# Altium PCB Misko 3.PcbDoc (part 1 of 4)
Units mm, origin at the board's own origin, x right, y up, seen from the top; angles counter-clockwise.
Board outline 128.1 x 53.3 mm, 6 copper layers (Top (LS), Mid 1 (LS), Mid 2 (GND), Mid 3 (P/HS), Mid 4 (GND), Bottom (HS)), stack 1.597 mm thick; 230 components, 214 nets, 896 pads, 500 vias.
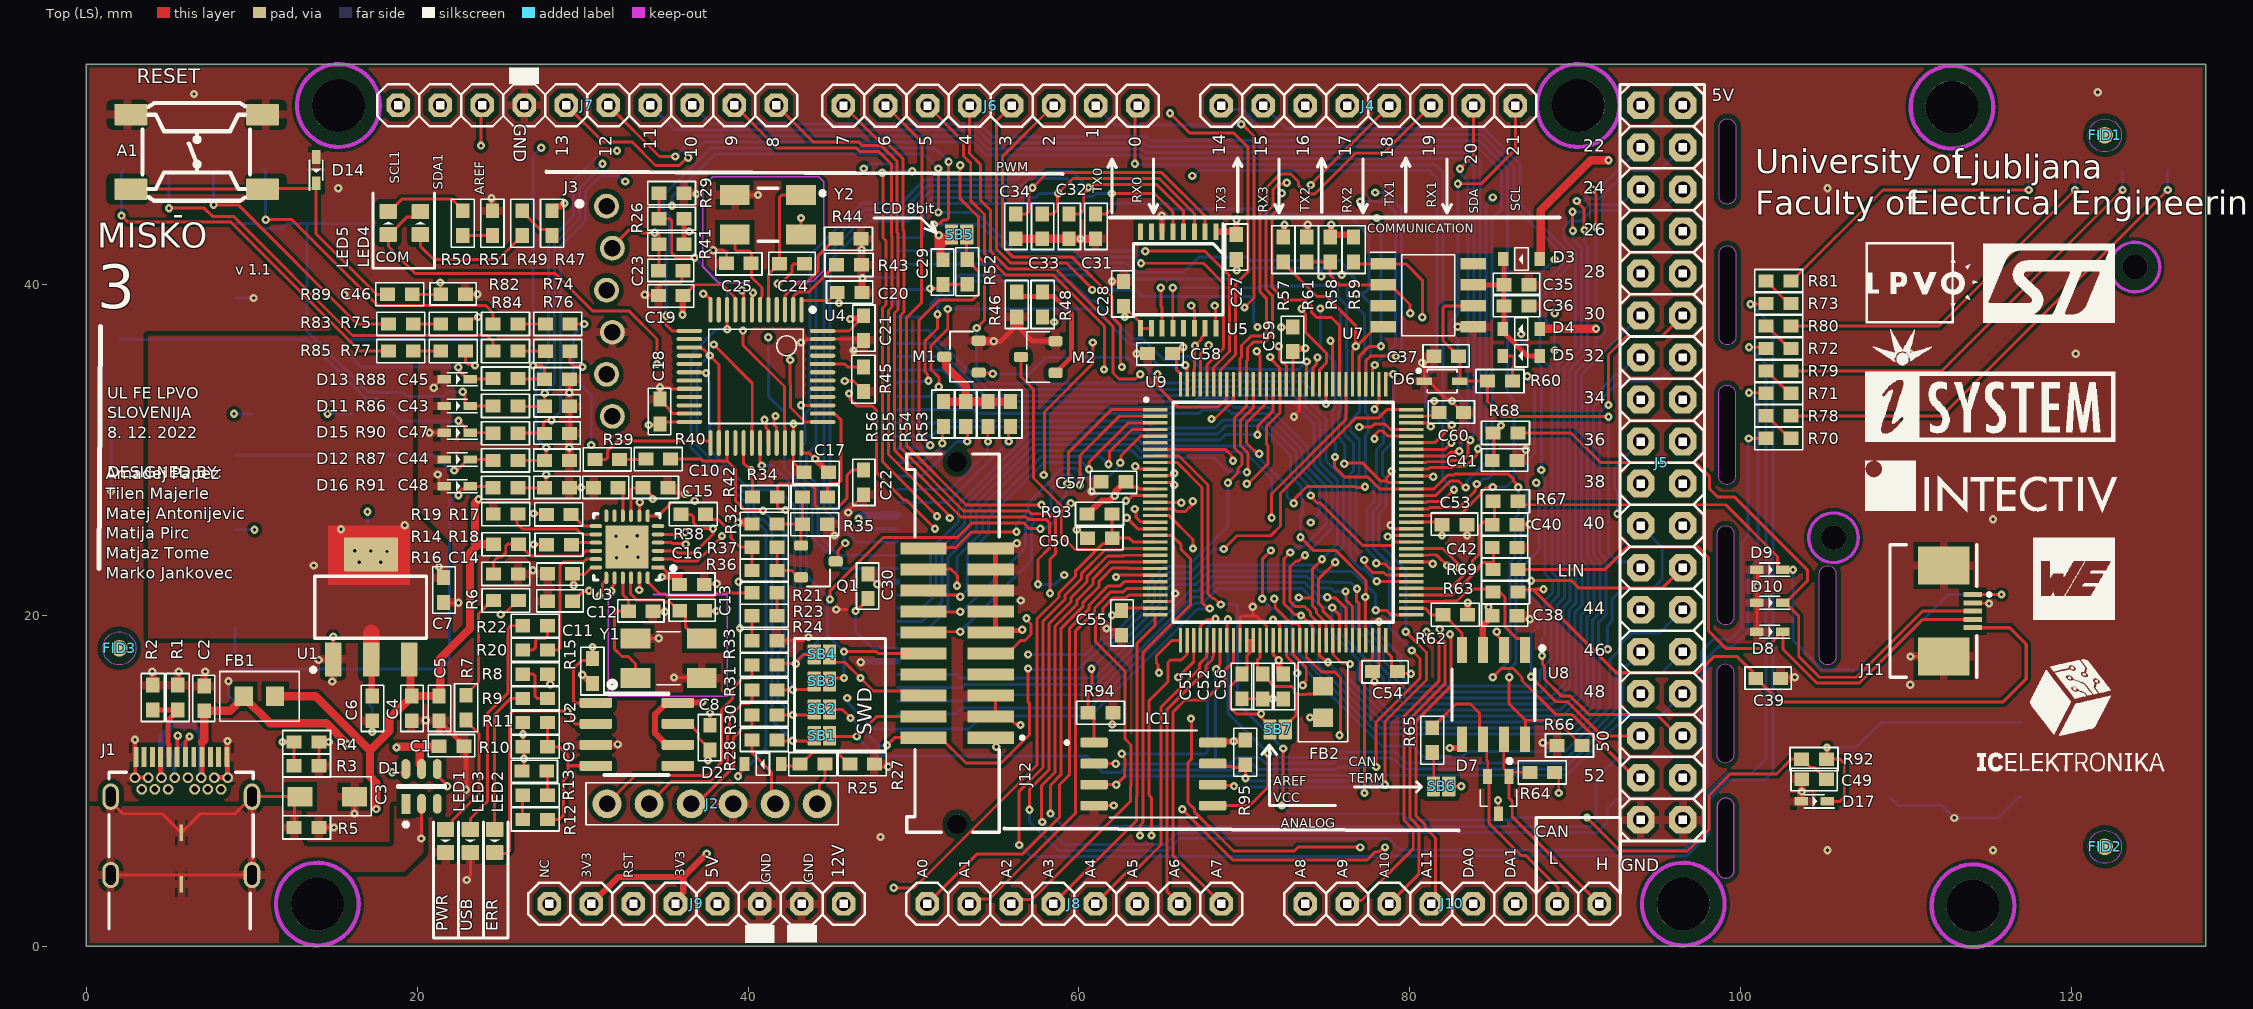
[diagram p0: Top (LS) view]
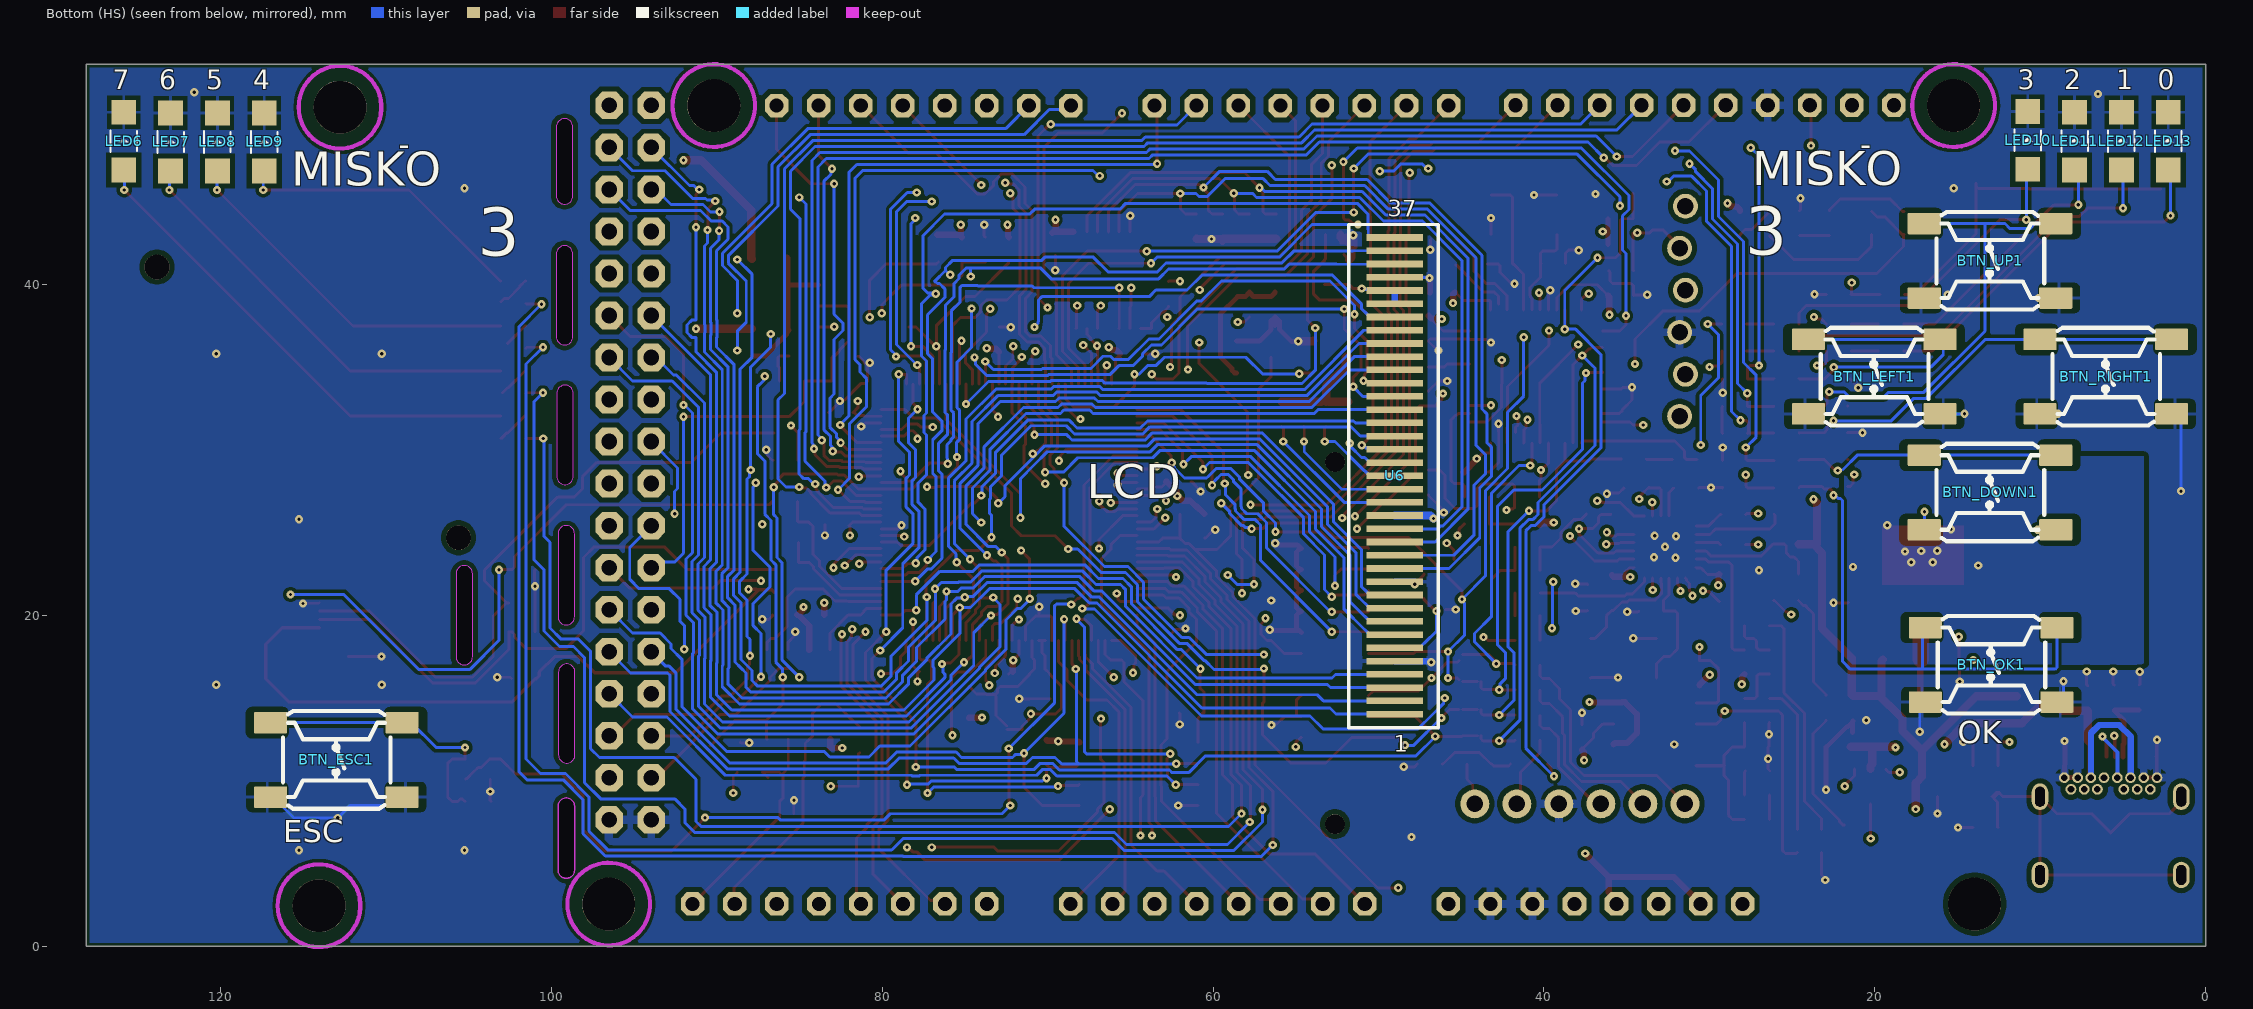
[diagram p1: Bottom (HS) view, seen from below]
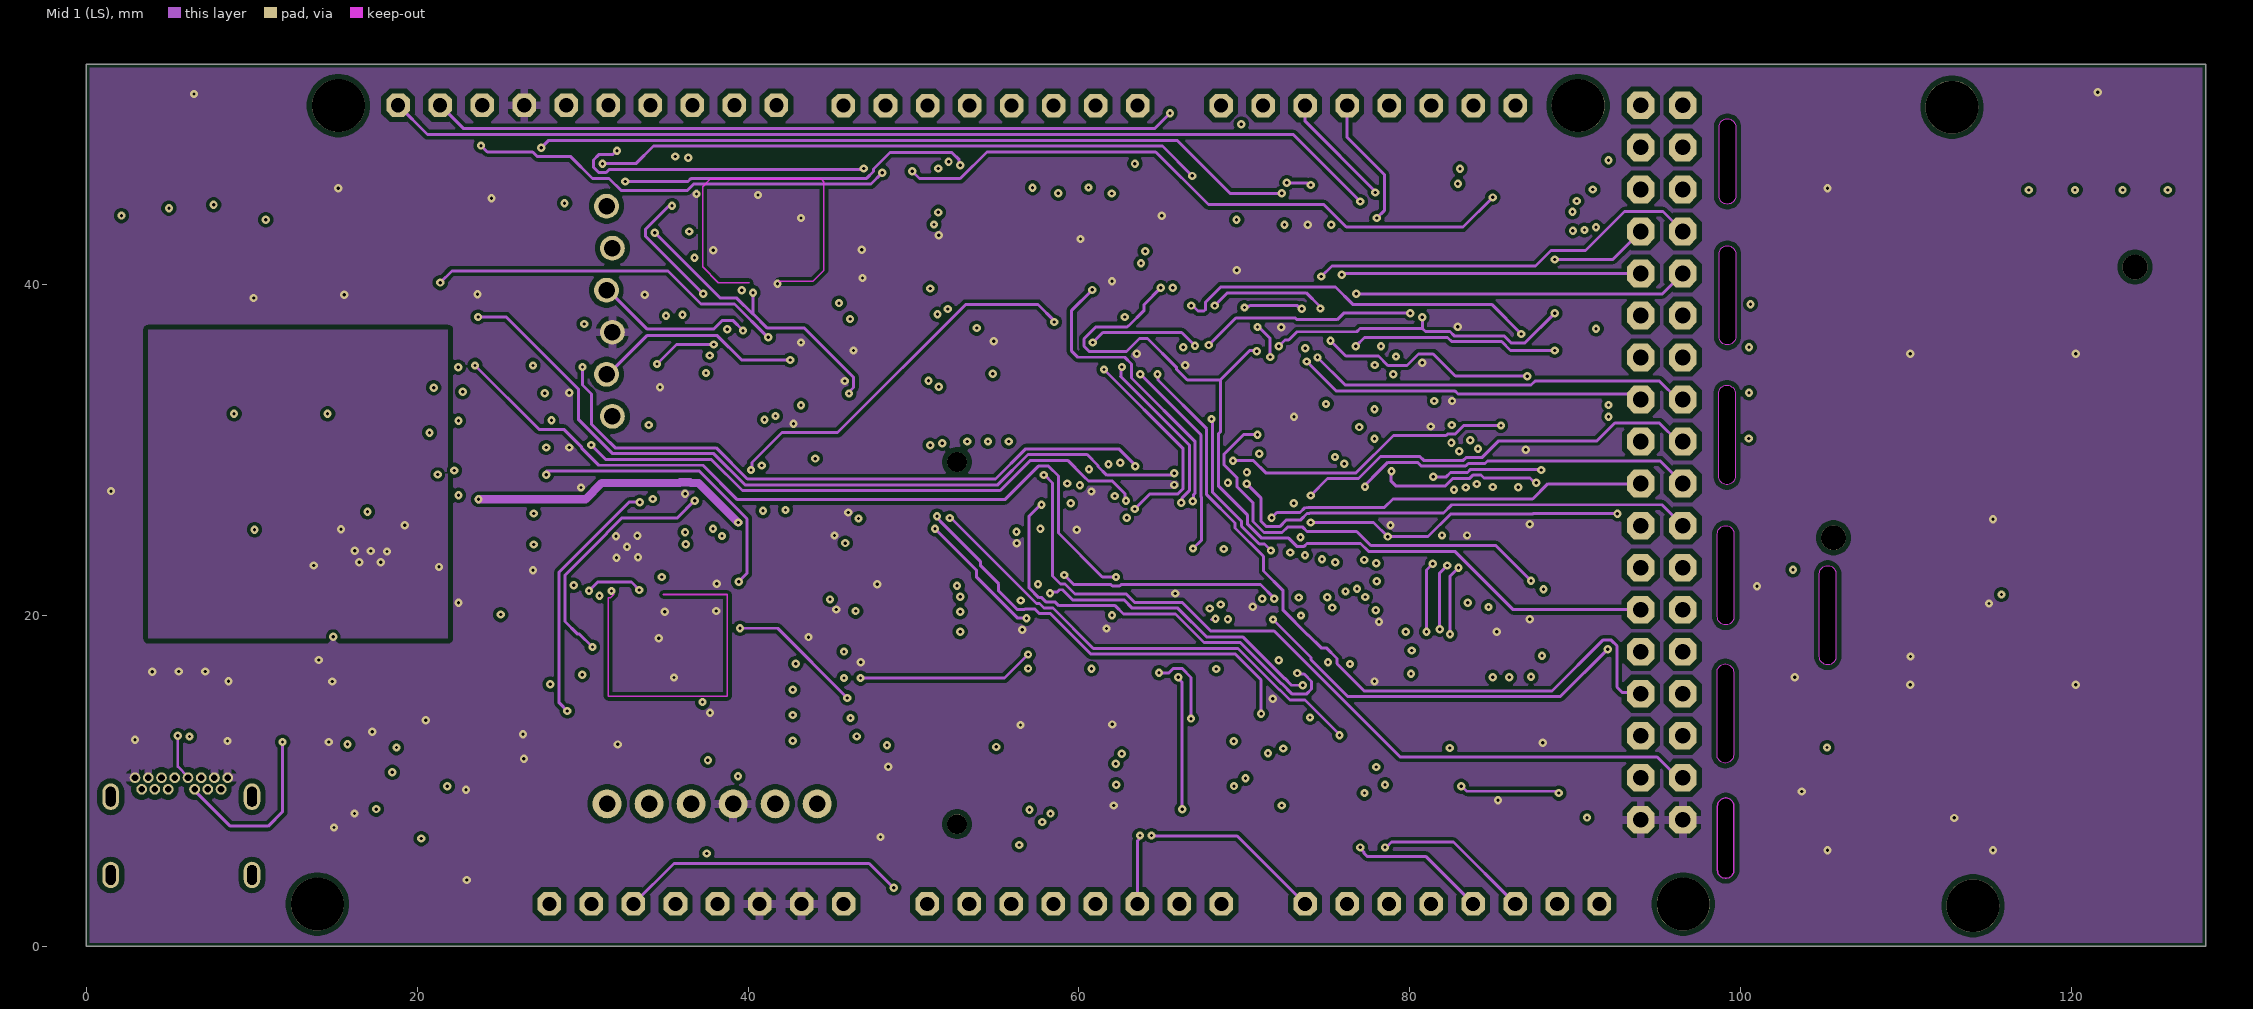
[diagram p2: Mid 1 (LS)]
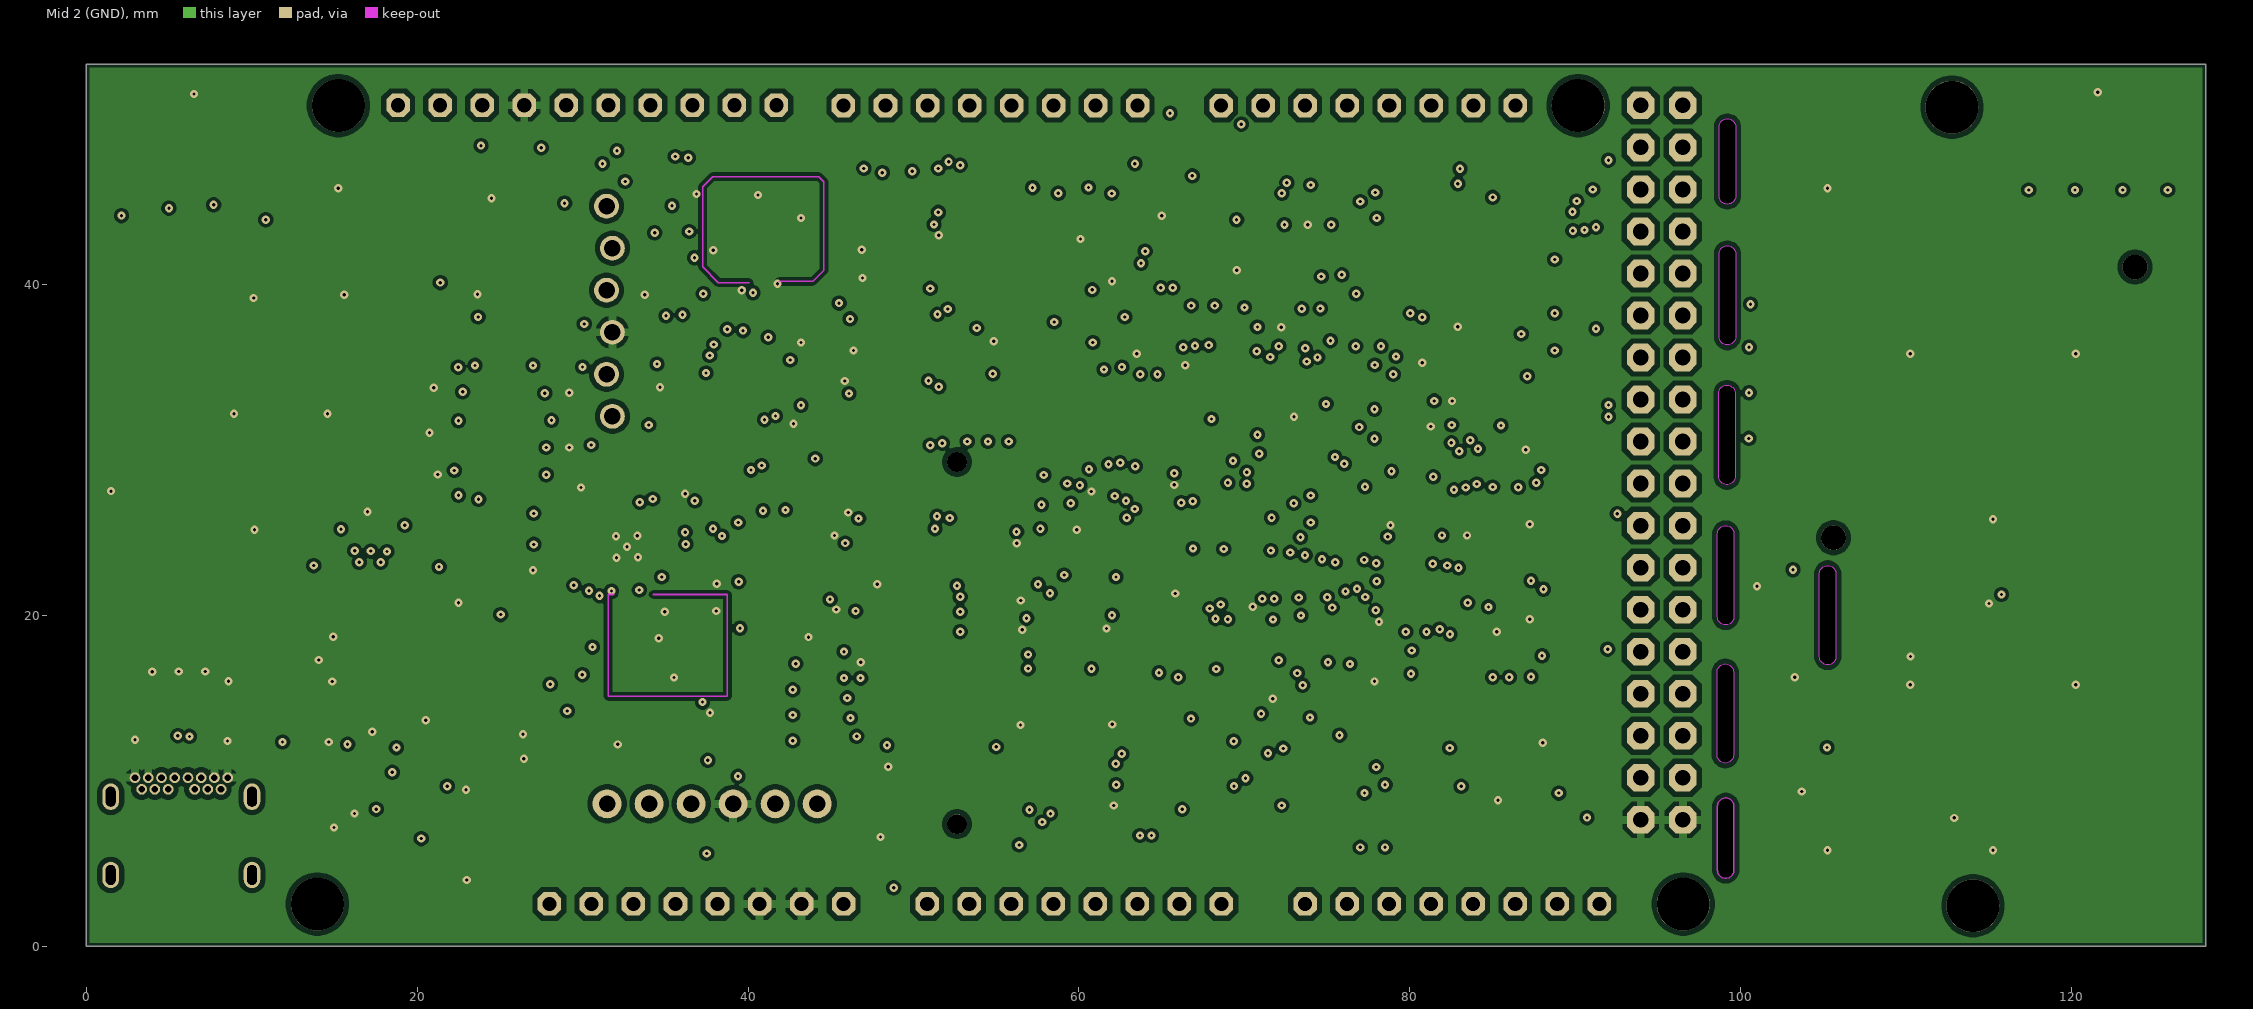
[diagram p3: Mid 2 (GND)]
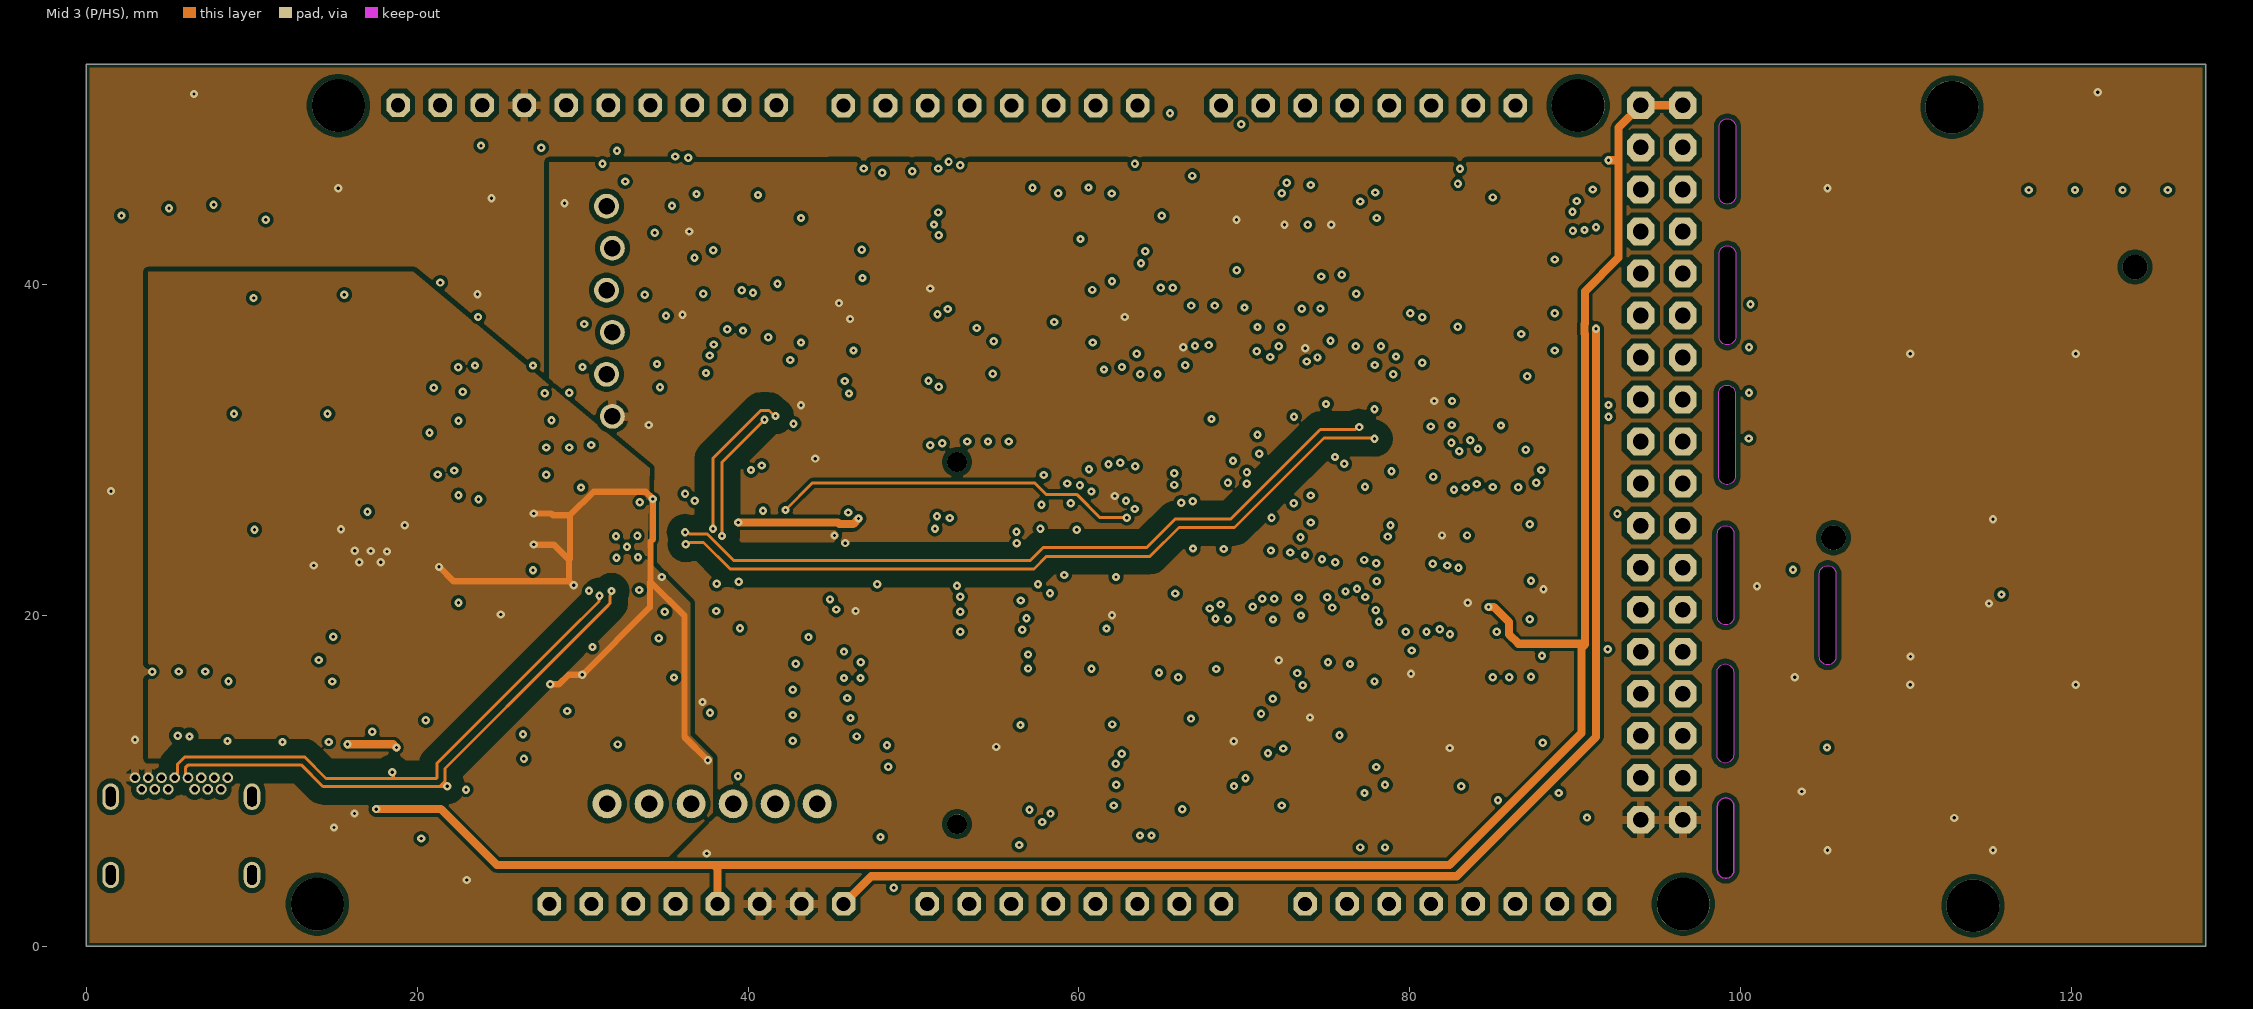
[diagram p4: Mid 3 (P/HS)]
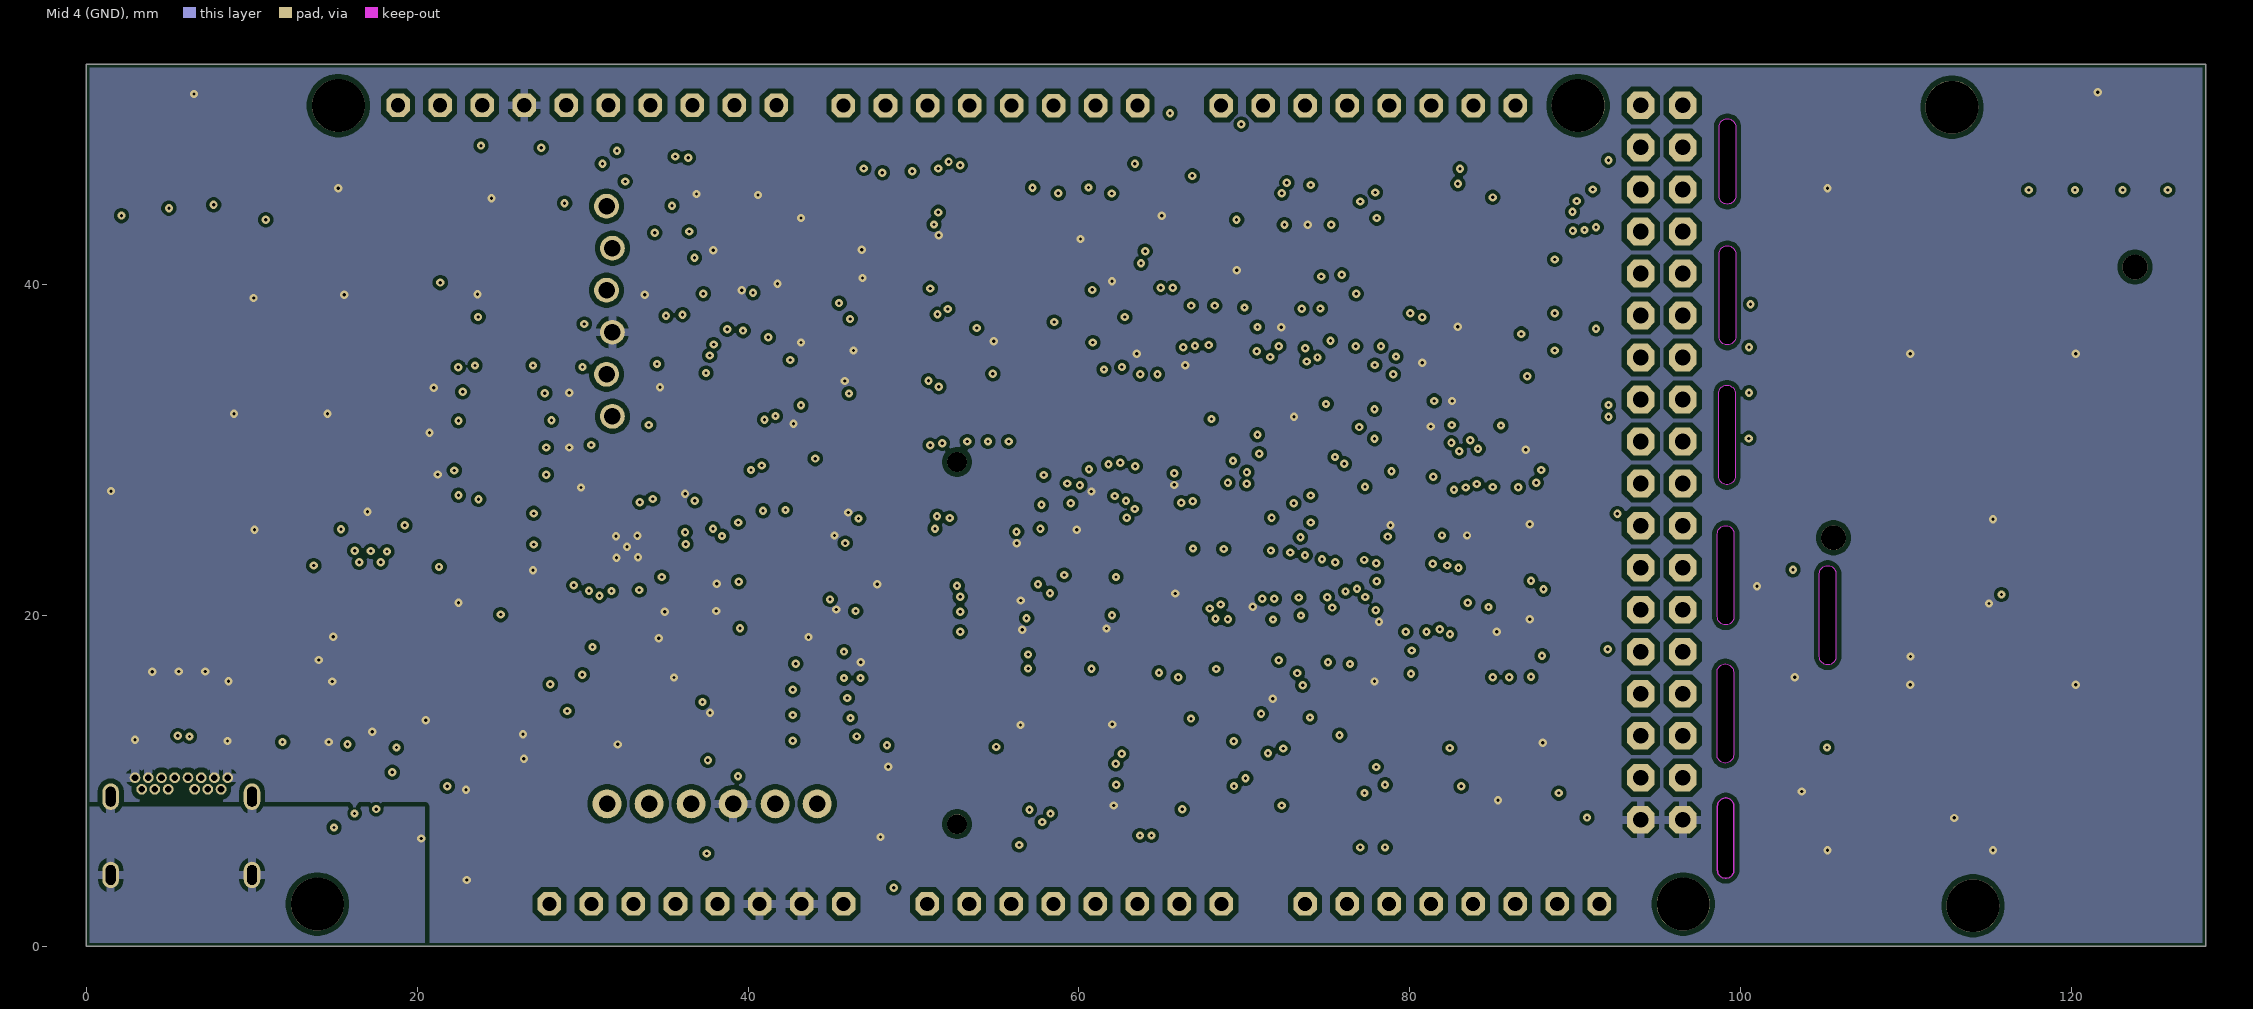
[diagram p5: Mid 4 (GND)]

## Layer stack, top to bottom
Top Mask: solder mask 0.015, Solder Resist, Dk 3.8
Top (LS): signal copper 0.035
Dielectric 1: prepreg 0.1, 2313, Dk 4.05
Mid 1 (LS): signal copper 0.0175
Core 1: core 0.565, FR-4, Dk 4.5
Mid 2 (GND): signal copper 0.0175
Dielectric 2: prepreg 0.127, 2116, Dk 4.25
Mid 3 (P/HS): signal copper 0.0175
Core 2: core 0.565, FR-4, Dk 4.5
Mid 4 (GND): signal copper 0.0175
Dielectric 3: prepreg 0.1, 2313, Dk 4.05
Bottom (HS): signal copper 0.035
Bottom Mask: solder mask 0.015, Solder Resist, Dk 3.8

## Board outline
0,0 128.1,0 128.1,53.3 0,53.3
cut-out: 104.75,17.5 104.75,22.5 cw(c105.25,22.5) 105.75,22.5 105.75,17.5 cw(c105.25,17.5)
cut-out: 98.687,45.339 98.687,49.505 cw(c99.187,49.505) 99.687,49.505 99.687,45.339 cw(c99.187,45.339)
cut-out: 98.687,36.83 98.687,41.83 cw(c99.187,41.83) 99.687,41.83 99.687,36.83 cw(c99.187,36.83)
cut-out: 98.661,28.397 98.661,33.397 cw(c99.162,33.397) 99.662,33.397 99.662,28.397 cw(c99.162,28.397)
cut-out: 98.585,19.914 98.585,24.914 cw(c99.085,24.914) 99.586,24.914 99.586,19.914 cw(c99.085,19.914)
cut-out: 98.56,11.557 98.56,16.557 cw(c99.06,16.557) 99.56,16.557 99.56,11.557 cw(c99.06,11.557)
cut-out: 98.585,4.592 98.585,8.454 cw(c99.085,8.454) 99.586,8.454 99.586,4.592 cw(c99.085,4.592)
cut-out: 98.585,4.605 ccw(c99.085,4.605) 99.586,4.605 99.586,8.454 ccw(c99.085,8.454) 98.585,8.454

## Design rules (kind name [scope] priority, off if disabled: settings)
BoardOutlineClearance [All] p1: gap=0.2 ignorepadtopadclearanceinfootprint=FALSE except(0.4: Arc-SplitBarrior Arc-SplitContinuation Track-SplitBarrior Track-SplitContinuation SMDPad-SplitBarrior SMDPad-SplitContinuation THPad-SplitBarrior THPad-SplitContinuation Via-SplitBarrior Via-SplitContinuation Fill-SplitBarrior Fill-SplitContinuation Poly-SplitBarrior Poly-SplitContinuation Region-SplitBarrior Region-SplitContinuation Text-SplitBarrior Text-SplitContinuation)
Clearance Clearance_USB [InNetClass('USB') vs OnLayer('Mid 3 (P/HS)')] p1: gap=0.3 ignorepadtopadclearanceinfootprint=TRUE except(0.12: Arc-Arc Arc-Track Arc-SMDPad Track-Track Track-SMDPad SMDPad-SMDPad; 0.127: Arc-Via Track-Via SMDPad-Via THPad-Via Via-Via; 0.15: THPad-THPad; 0.2: Arc-THPad Arc-Hole Track-THPad Track-Hole SMDPad-THPad SMDPad-Hole THPad-Hole Via-Hole Text-Hole; 0.254: Arc-Text Track-Text SMDPad-Text THPad-Text Via-Text Text-Text; 1: Arc-Fill Arc-Poly Arc-Region Track-Fill Track-Poly Track-Region)
Clearance "Clearance Outer LAyers" [(OnLayer('Top (LS)') OR OnLayer('Bottom (HS)'))] p2: gap=0.2 ignorepadtopadclearanceinfootprint=TRUE except(0.15: THPad-THPad; 0.18: Arc-Arc Arc-Track Track-Track; 0.254: Arc-Text Track-Text SMDPad-Text THPad-Text Via-Text Text-Text; 0.3: SMDPad-Fill SMDPad-Poly SMDPad-Region THPad-Fill THPad-Poly THPad-Region Fill-Fill Fill-Poly Fill-Region Fill-Text Fill-Hole Poly-Poly Poly-Region Poly-Text Poly-Hole Region-Region Region-Text Region-Hole)
Clearance [All] p3: gap=0.2 ignorepadtopadclearanceinfootprint=TRUE except(0.15: THPad-THPad; 0.17: Arc-Arc Arc-Track Track-Track; 0.254: Arc-Text Track-Text SMDPad-Text THPad-Text Via-Text Text-Text; 0.3: SMDPad-Fill SMDPad-Poly SMDPad-Region THPad-Fill THPad-Poly THPad-Region Fill-Fill Fill-Poly Fill-Region Fill-Text Fill-Hole Poly-Poly Poly-Region Poly-Text Poly-Hole Region-Region Region-Text Region-Hole)
DiffPairsRouting [InDifferentialPairClass('All Differential Pairs')] p1: maxlimit=1.2 minlimit=0.254 mostfreqgap=1.114 toplayer_mingap=0.3 toplayer_minwidth=0.18 toplayer_maxwidth=0.22 toplayer_prefwidth=0.22 midlayer1_mingap=0.7 midlayer1_maxgap=0.9 midlayer1_prefgap=0.871 midlayer1_minwidth=0.16 midlayer1_maxwidth=0.16 midlayer1_prefwidth=0.16 midlayer3_mingap=0.3 midlayer3_maxgap=0.4 midlayer3_prefgap=0.377 midlayer3_minwidth=0.18 midlayer3_maxwidth=0.18 midlayer3_prefwidth=0.18 bottomlayer_mingap=0.3 bottomlayer_minwidth=0.22 bottomlayer_maxwidth=0.22 bottomlayer_prefwidth=0.22 impedanceprofiledriven=TRUE impedanceprofileid={B0114516-4247-4580-AF57-087C0DDC30B5} impedanceprofilevalue=90.000000 maxuncoupledlength=12.7
Height [All] p1: minheight=0 maxheight=500 prefheight=12.7
HoleSize [All] p1: absolutevalues=TRUE maxlimit=6.3 minlimit=0.2 maxpercent=80.000 minpercent=20.000
HoleToHoleClearance [All] p1: gap=0.4 allowstackedmicrovias=TRUE
MatchedLengths [InDifferentialPair ('USB_DATA_DIFF')] p1: tolerance=25.4 checknetsindiffpair=FALSE checkdiffpairvsdiffpair=TRUE checkxsignals=TRUE checkothers=TRUE
MinimumAnnularRing [All] p1: minimumring=0.076
MinimumSolderMaskSliver [All] p1: minsoldermaskwidth=0.1
PasteMaskExpansion [All] p1: expansion=-0.02 percent=-20.000000
PolygonConnect PolygonConnect_bot [OnBottomLayer] p1: thpad.connectstyle=Relief thpad.reliefconductorwidth=0.508 thpad.reliefentries=4 thpad.polygonreliefangle="90 Angle" thpad.airgapwidth=0.254 smdpad.connectstyle=Relief smdpad.reliefconductorwidth=0.2 smdpad.reliefentries=4 smdpad.polygonreliefangle="90 Angle" smdpad.airgapwidth=0.254 via.connectstyle=Direct via.reliefconductorwidth=0.508 via.reliefentries=4 via.polygonreliefangle="90 Angle" via.airgapwidth=0.254
PolygonConnect [All] p2: thpad.connectstyle=Relief thpad.reliefconductorwidth=0.508 thpad.reliefentries=4 thpad.polygonreliefangle="90 Angle" thpad.airgapwidth=0.254 smdpad.connectstyle=Relief smdpad.reliefconductorwidth=0.508 smdpad.reliefentries=4 smdpad.polygonreliefangle="90 Angle" smdpad.airgapwidth=0.254 via.connectstyle=Direct via.reliefconductorwidth=0.508 via.reliefentries=4 via.polygonreliefangle="90 Angle" via.airgapwidth=0.254
RoutingCorners [All] p1: cornerstyle=Round minsetback=2.54 maxsetback=2.54
RoutingVias [All] p1: holewidth=0.5 width=1 viastyle="Through Hole" minholewidth=0.2 minwidth=0.5 maxholewidth=1 maxwidth=2
SilkToSilkClearance [All] p1: silktosilkclearance=0.01
SilkToSolderMaskClearance [IsPad] p1: minsilkscreentomaskgap=0.05 clearancetoexposedcopper=TRUE
SolderMaskExpansion SolderMaskExpansion_via [IsVia] p1: expansion=0.102 istentingtop=TRUE
SolderMaskExpansion [All] p2: expansion=0.1 istentingtop=FALSE
Width [All] p1: maxlimit=1 minlimit=0.15 preferedwidth=0.18
21 further rules are at their usual default settings.

## Classes and differential pairs
component class U_MCU: C50 C51 C52 C53 C54 C55 C56 C57 C58 C59 C60 FB2 R93 SB7 T11 U9
component class "U_LCD + TOUCH": C27 C28 C29 C30 C31 C32 C33 C34 M1 R52 R53 R54 R55 R56 SB5 T7 U5 U6
net class DAC[1..2]: DAC1 DAC2
component class U_TRACE: J12
net class QSPI_IO[0..3]: QSPI_IO0 QSPI_IO1 QSPI_IO2 QSPI_IO3
net class LED[0..7]: LED0 LED1 LED2 LED3 LED4 LED5 LED6 LED7
net class AD[0..11]: AD0 AD1 AD2 AD3 AD4 AD5 AD6 AD7 AD8 AD9 AD10 AD11
net class USB: USB2_N USB2_P USB_N USB_P USB_STLINK_N USB_STLINK_P
net class PWM[2..13]: PWM2 PWM3 PWM4 PWM5 PWM6 PWM7 PWM8 PWM9 PWM10 PWM11 PWM12 PWM13
net class FMC_D[0..15]: FMC_D0 FMC_D1 FMC_D2 FMC_D3 FMC_D4 FMC_D5 FMC_D6 FMC_D7 FMC_D8 FMC_D9 FMC_D10 FMC_D11 FMC_D12 FMC_D13 FMC_D14 FMC_D15
component class U_USB_HUB: C10 C11 C12 C13 C14 C15 C16 LED3 R14 R15 R16 R17 R18 R19 R20 R21 R22 R23 R24 T5 U3 Y1
component class U_USB_C: C1 C2 C3 D1 J1 J? R1 R2 R3 R4 R5 T3
component class U_STLINK_2.1: C17 C18 C19 C20 C21 C22 C23 C24 C25 D2 J2 J3 LED4 LED5 M2 Q1 R25 R26 R27 R28 R29 R30 R31 R32 R33 R34 R35 R36 R37 R38 R39 R40 R41 R42 R43 R44 R45 R46 R47 R48 R49 R50 R51 SB1 SB2 SB3 SB4 T6 U4 Y2
component class U_POWER: C4 C5 C6 C7 C8 C9 FB1 LED1 LED2 R6 R7 R8 R9 R10 R11 R12 R13 T12 U1 U2
component class "U_CAN + LIN": C35 C36 C37 C38 D3 D4 D5 D6 D7 R57 R58 R59 R60 R61 R62 R63 R64 R65 R66 SB6 T8 U7 U8
component class "U_JOYSTICK + LED": C39 C40 C41 C42 D8 D9 D10 J11 LED6 LED7 LED8 LED9 LED10 LED11 LED12 LED13 R67 R68 R69 R70 R71 R72 R73 R74 R75 R76 R77 R78 R79 R80 R81 R82 R83 R84 R85 T10
component class U_QSPI: IC1 R94 R95 T9
component class U_BUTTONS: A1 BTN_DOWN1 BTN_ESC1 BTN_LEFT1 BTN_OK1 BTN_RIGHT1 BTN_UP1 C43 C44 C45 C46 C47 C48 C49 D11 D12 D13 D14 D15 D16 D17 R86 R87 R88 R89 R90 R91 R92 T11
component class U_ARDUINO_GPIO: J4 J5 J6 J7 J8 J9 J10 T7
component class HIREARCHY: FID1 FID2 FID3 T2
differential pair USB2: +USB2_P -USB2_N
differential pair USB: +USB_P -USB_N
differential pair USB_STLINK: +USB_STLINK_P -USB_STLINK_N

## Components (designator, comment, footprint, x,y, rotation, side; value= is the part's Value field where it differs from the comment)
A1 "Button_6x6" "Tipka 6x6"#1 6.7,48 r90 top value=Reset
BTN_DOWN1 "Button_6x6" "Tipka 6x6"#2 13.067,27.417 r270 bottom locked value=UI
BTN_ESC1 "Button_6x6" "Tipka 6x6"#2 113.004,11.256 r270 bottom value=UI
BTN_LEFT1 "Button_6x6" "Tipka 6x6"#2 20.067,34.417 r270 bottom locked value=UI
BTN_OK1 "Button_6x6" "Tipka 6x6"#2 13,17 r270 bottom locked value=UI
BTN_RIGHT1 "Button_6x6" "Tipka 6x6"#2 6.067,34.417 r270 bottom locked value=UI
BTN_UP1 "Button_6x6" "Tipka 6x6"#2 13.067,41.417 r270 bottom locked value=UI
C1 "" C0603 22.08,12.085 r180 top value=4u7
C2 "" C0603 7.129,14.973 r270 top value=4u7
C3 "" C1206 14.569,9.03 r180 top value=1n/2kV
C4 "" C0603 19.669,14.373 r90 top value=4u7
C5 "" C0603 21.323,14.369 r90 top value=4u7
C6 "" C0603 17.282,14.373 r90 top value=4u7
C7 "" C0603 21.601,21.519 r90 top value=4u7
C8 "" C0603 37.7,12.6 r270 top value=100n
C9 "" C0603 27.082,10.584 r0 top value=1u
C10 "" C0603 31.4,27.7 r180 top value=1u
C11 "" C0603 28.631,20.84 r180 top value=100n
C12 "" C0603 33.516,20.242 r180 top value=10p
C13 "" C0603 36.62,20.274 r180 top value=10p
C14 "" C0603 28.631,22.504 r0 top value=1u
C15 "" C0603 34.4,27.7 r180 top value=1u
C16 "" C0603 36.603,21.854 r180 top value=1u
C17 "" C0603 44.12,28.646 r0 top value=100n
C18 "" C0603 34.675,32.307 r270 top value=100n
C19 "" C0603 35.328,39.321 r0 top value=100n
C20 "" C0603 46.14,39.502 r180 top value=100n
C21 "" C0603 46.97,37.346 r90 top value=100n
C22 "" C0603 46.97,28.03 r90 top value=10p
C23 "" C0603 35.328,40.817 r180 top value=100n
C24 "" C0603 42.658,41.235 r180 top value=10p
C25 "" C0603 39.438,41.265 r0 top value=10p
C27 "" C0603 69.504,42.247 r90 top value=100n
C28 "" C0603 62.687,39.421 r270 top value=100n
C29 "" C0603 51.778,40.73 r270 top value=4u7
C30 "" C0603 47.25,21.75 r270 top value=4u7
C31 "" C0603 61,43.5 r90 top value=NP
C32 "" C0603 59.391,43.5 r90 top value=NP
C33 "" C0603 57.783,43.5 r90 top value=NP
C34 "" C0603 56.174,43.5 r90 top value=NP
C35 "" C0603 86.444,39.964 r180 top value=100n
C36 "" C0603 86.44,38.694 r180 top value=4u7
C37 "" C0603 82.194,35.649 r180 top value=1n
C38 "" C0603 85.724,19.973 r180 top value=100n
C39 "" C0603 101.65,16.168 r180 top value=100n
C40 "" C0603 85.724,25.463 r180 top value=100n
C41 "" C0603 85.724,29.355 r180 top value=NP
C42 "" C0603 85.724,24.09 r180 top value=100n
C43 "" C0603 28.45,32.625 r180 top value=NP
C44 "" C0603 28.45,29.342 r180 top value=NP
C45 "" C0603 28.45,34.267 r180 top value=NP
C46 "" C0603 22.179,39.393 r180 top value=100n
C47 "" C0603 28.45,30.983 r180 top value=NP
C48 "" C0603 28.45,27.7 r180 top value=NP
C49 "" C0603 104.434,10.091 r0 top value=NP
C50 "" C0603 61.257,24.655 r0 top value=100n
C51 "" C0603 69.852,15.7 r90 top value=100n
C52 "" C0603 71.1,15.694 r90 top value=100n
C53 "" C0603 82.69,25.473 r180 top value=100n
C54 "" C0603 78.5,16.6 r0 top value=100n
C55 "" C0603 62.57,19.54 r90 top value=100n
C56 "" C0603 72.345,15.694 r90 top value=100n
C57 "" C0603 62.087,28.059 r0 top value=100n
C58 "" C0603 64.895,35.821 r0 top value=100n
C59 "" C0603 72.925,36.675 r270 top value=100n
C60 "" C0603 82.5,32.25 r180 top value=100n
D1 "SP3051-04HTG" FP-SP3051-IPC_C 20.269,9.653 r90 top
D2 "BAT54HT1G" ONSC-SOD-323-2-477-02_V 40.9,11 r0 top
D3 "BAT54HT1G" ONSC-SOD-323-2-477-02_V 86.744,41.524 r0 top
D4 "BAT54HT1G" ONSC-SOD-323-2-477-02_V 86.73,37.296 r0 top
D5 "BAT54HT1G" ONSC-SOD-323-2-477-02_V 86.73,35.671 r0 top
D6 "PESD1LIN" PESD1LIN_footprint 81.944,34.149 r0 top
D7 "NUP2125" SOT23127P600-8N 85.35,9.125 r270 top
D8 "ESD7371XV2T1G" SOD1608X70N 101.75,19 r180 top
D9 "ESD7371XV2T1G" SOD1608X70N 101.75,22.75 r180 top
D10 "ESD7371XV2T1G" SOD1608X70N 101.75,20.75 r180 top
D11 "ESD7371XV2T1G" SOD1608X70N 22.43,32.643 r180 top
D12 "ESD7371XV2T1G" SOD1608X70N 22.43,29.409 r180 top
D13 "ESD7371XV2T1G" SOD1608X70N 22.43,34.26 r180 top
D14 "ESD7371XV2T1G" SOD1608X70N 13.9,46.9 r90 top
D15 "ESD7371XV2T1G" SOD1608X70N 22.43,31.026 r180 top
D16 "ESD7371XV2T1G" SOD1608X70N 22.43,27.792 r180 top
D17 "ESD7371XV2T1G" SOD1608X70N 104.434,8.75 r180 top
FB1 "BLM21BB201SN1D" BLM2102FB0805 10.468,15.1 r0 top
FB2 "BLM21BB201SN1D" BLM2102FB0805 74.75,14.75 r270 top
FID1 "Fiducial" Fiducial 122,49 r90 top
FID2 "Fiducial" Fiducial 122,6 r90 top
FID3 "Fiducial" Fiducial 2,18 r90 top
IC1 "W25Q128JVSIM" W25Q128JVSIM 64.499,10.4 r0 top
J1 "632723300011" 632723300011 5.75,5.5 r0 top
J2 "Header 1x6 (male)" H1x6 37.83,8.6 r0 top
J3 "Header 1x6 (male)" H1x6_no3D 31.624,38.395 r90 top
J4 "8x1F-H8.5" 1X08 77.481,50.8 r180 top
J5 "18x2F-H8.5" 2X18 95.222,29.223 r270 top locked
J6 "8x1F-H8.5" 1X08 54.656,50.8 r180 top locked
J7 "10x1F-H8.5" 1X10 30.284,50.82 r180 top locked
J8 "8x1F-H8.5" 1X08 59.718,2.554 r0 top locked
J9 "8x1F-H8.5" 1X08 36.884,2.554 r0 top locked
J10 "8x1F-H8.5" 1X08 82.556,2.554 r0 top locked
J11 "FPC 5 pin" "FPC 1734839-5" 114.013,19.25 r180 top
J12 "ESHF-110-01-L-D-SM-LC" ESHF-110-01-L-D-SM-LC 52.633,18.315 r90 top
LED1 "GREEN" LED0603 21.714,6.358 r90 top
LED2 "RED" LED0603 24.69,6.358 r90 top
LED3 "GREEN" LED0603 23.219,6.358 r90 top
LED4 "GREEN" LED0603 20.195,43.7 r270 top
LED5 "RED" LED0603 18.25,43.7 r270 top
LED6 "BLUE" LED1206 125.828,48.65 r270 bottom locked
LED7 "BLUE" LED1206 123,48.6 r270 bottom locked
LED8 "BLUE" LED1206 120.172,48.6 r270 bottom locked
LED9 "BLUE" LED1206 117.345,48.6 r270 bottom locked
LED10 "BLUE" LED1206 10.756,48.7 r270 bottom locked
LED11 "BLUE" LED1206 7.928,48.65 r270 bottom locked
LED12 "BLUE" LED1206 5.1,48.65 r270 bottom locked
LED13 "BLUE" LED1206 2.273,48.65 r270 bottom locked
M1 "BSS138" SOT23-3_L 52.901,35.627 r90 top
M2 "BSS138" SOT23-3_L 57.539,35.602 r90 top
Q1 "BC847C" SOT23-3_L 44.25,23.25 r270 top
R1 "" R1608_0603I_L 5.526,15.023 r90 top value=10k
R2 "" R1608_0603I_L 4.026,15.023 r90 top value=10k
R3 "" R1608_0603I_L 13.319,10.901 r0 top value=10k
R4 "" R1608_0603I_L 13.319,12.336 r0 top value=10k
R5 "" R1608_0603I_L 13.319,7.173 r0 top value=1M
R6 "" R1608_0603I_L 25.367,20.888 r180 top value=1k
R7 "" R1608_0603I_L 22.954,14.41 r270 top value=1k
R8 "" R1608_0603I_L 27.132,16.436 r0 top value=1k
R9 "" R1608_0603I_L 27.132,14.973 r0 top value=1k
R10 "" R1608_0603I_L 27.132,12.047 r0 top value=1k
R11 "" R1608_0603I_L 27.132,13.51 r0 top value=1k
R12 "" R1608_0603I_L 27.132,7.658 r0 top value=56
R13 "" R1608_0603I_L 27.132,9.121 r180 top value=56
R14 "" R1608_0603I_L 25.366,24.29 r180 top value=10k
R15 "" R1608_0603I_L 30.593,16.622 r270 top value=10k
R16 "" R1608_0603I_L 25.36,22.496 r180 top value=10k
R17 "" R1608_0603I_L 28.559,26.093 r0 top value=100k
R18 "" R1608_0603I_L 28.575,24.257 r180 top value=10k
R19 "" R1608_0603I_L 25.35,26.11 r0 top value=100k
R20 "" R1608_0603I_L 27.132,17.899 r180 top value=1k
R21 "" R1608_0603I_L 40.989,21.354 r0 top value=10k
R22 "" R1608_0603I_L 27.132,19.362 r180 top value=1k
R23 "" R1608_0603I_L 40.989,19.967 r0 top value=1k
R24 "" R1608_0603I_L 40.989,18.456 r180 top value=1k
R25 "" R1608_0603I_L 43.9,11 r180 top value=56
R26 "" R1608_0603I_L 35.378,43.96 r180 top value=10k
R27 "" R1608_0603I_L 46.9,11 r180 top value=10k
R28 "" R1608_0603I_L 40.989,12.459 r0 top value=56
R29 "" R1608_0603I_L 35.378,45.506 r180 top value=10k
R30 "" R1608_0603I_L 40.989,13.969 r0 top value=56
R31 "" R1608_0603I_L 40.989,15.48 r0 top value=56
R32 "" R1608_0603I_L 40.989,25.517 r0 top value=10k
R33 "" R1608_0603I_L 40.989,16.991 r0 top value=56
R34 "" R1608_0603I_L 44.048,27.142 r0 top value=56
R35 "" R1608_0603I_L 44.038,25.498 r0 top value=100k
R36 "" R1608_0603I_L 40.989,22.696 r0 top value=1k
R37 "" R1608_0603I_L 40.989,24.107 r0 top value=1k
R38 "" R1608_0603I_L 36.689,26.108 r0 top value=1k
R39 "" R1608_0603I_L 31.49,29.417 r0 top value=56
R40 "" R1608_0603I_L 34.574,29.437 r0 top value=56
R41 "" R1608_0603I_L 35.378,42.414 r180 top value=10k
R42 "" R1608_0603I_L 41.017,27.142 r180 top value=56
R43 "" R1608_0603I_L 46.101,41.173 r0 top value=10k
R44 "" R1608_0603I_L 46.074,42.75 r0 top value=10k
R45 "" R1608_0603I_L 46.97,34.258 r90 top value=100k
R46 "" R1608_0603I_L 56.241,38.777 r270 top value=100k
R47 "" R1608_0603I_L 28.152,43.693 r90 top value=1k
R48 "" R1608_0603I_L 57.799,38.777 r90 top value=100k
R49 "" R1608_0603I_L 26.352,43.693 r90 top value=1k
R50 "" R1608_0603I_L 22.752,43.693 r270 top value=1k
R51 "" R1608_0603I_L 24.552,43.693 r90 top value=1k
R52 "" R1608_0603I_L 53.25,40.75 r270 top value=10k
R53 "" R1608_0603I_L 55.857,32.157 r270 top value=56
R54 "" R1608_0603I_L 54.508,32.157 r270 top value=56
R55 "" R1608_0603I_L 53.158,32.157 r270 top value=56
R56 "" R1608_0603I_L 51.808,32.157 r270 top value=56
R57 "" R1608_0603I_L 72.347,42.097 r270 top value=10k
R58 "" R1608_0603I_L 75.18,42.097 r270 top value=10k
R59 "" R1608_0603I_L 76.597,42.097 r270 top value=10k
R60 "" R1608_0603I_L 85.444,34.149 r180 top value=1k
R61 "" R1608_0603I_L 73.763,42.097 r270 top value=NP
R62 "" R1608_0603I_L 82.741,20.023 r180 top value=10k
R63 "" R1608_0603I_L 85.774,21.395 r180 top value=10k
R64 "" R1608_0603I_L 88,10.5 r0 top value=56
R65 "" R1608_0603I_L 81.35,12.448 r270 top value=56
R66 "" R1608_0603I_L 89.645,12.132 r180 top value=NP
R67 "" R1608_0603I_L 85.774,26.885 r0 top value=1k
R68 "" R1608_0603I_L 85.774,31.017 r0 top value=1k
R69 "" R1608_0603I_L 85.774,22.768 r0 top value=1k
R70 "" R1608_0603I_L 102.282,30.694 r180 top value=1k
R71 "" R1608_0603I_L 102.282,33.408 r180 top value=1k
R72 "" R1608_0603I_L 102.282,36.122 r180 top value=1k
R73 "" R1608_0603I_L 102.282,38.837 r180 top value=1k
R74 "" R1608_0603I_L 28.5,37.6 r0 top value=1k
R75 "" R1608_0603I_L 22.179,37.6 r0 top value=1k
R76 "" R1608_0603I_L 28.5,35.958 r0 top value=1k
R77 "" R1608_0603I_L 22.179,35.965 r0 top value=1k
R78 "" R1608_0603I_L 102.282,32.051 r180 top value=1k
R79 "" R1608_0603I_L 102.282,34.765 r180 top value=1k
R80 "" R1608_0603I_L 102.282,37.48 r180 top value=1k
R81 "" R1608_0603I_L 102.282,40.194 r180 top value=1k
R82 "" R1608_0603I_L 25.34,37.6 r0 top value=1k
R83 "" R1608_0603I_L 19.019,37.6 r0 top value=1k
R84 "" R1608_0603I_L 25.34,35.965 r0 top value=1k
R85 "" R1608_0603I_L 19.019,35.965 r0 top value=1k
R86 "" R1608_0603I_L 25.34,32.65 r180 top value=1k
R87 "" R1608_0603I_L 25.34,29.35 r180 top value=1k
R88 "" R1608_0603I_L 25.34,34.3 r180 top value=1k
R89 "" R1608_0603I_L 18.952,39.393 r180 top value=56
R90 "" R1608_0603I_L 25.34,31 r180 top value=1k
R91 "" R1608_0603I_L 25.34,27.7 r180 top value=1k
R92 "" R1608_0603I_L 104.424,11.301 r0 top value=1k
R93 "" R1608_0603I_L 61.237,26.123 r0 top value=1k
R94 "" R1608_0603I_L 61.3,14.1 r0 top value=10k
R95 "" R1608_0603I_L 70.049,11.71 r270 top value=10k
SB1 "SD_JUMP" SOLDER_JUMPER 44.465,12.714 r180 top
SB2 "SD_JUMP" SOLDER_JUMPER 44.465,14.311 r180 top
SB3 "SD_JUMP" SOLDER_JUMPER 44.465,15.993 r180 top
SB4 "SD_JUMP" SOLDER_JUMPER 44.465,17.626 r180 top
SB5 "SD_JUMP" SOLDER_JUMPER 52.75,43 r180 top
SB6 "SD_JUMP" SOLDER_JUMPER 81.89,9.657 r0 top
SB7 "SD_JUMP" SOLDER_JUMPER 72,13.1 r0 top
U1 "LM1117MPX-3.3" DCY0004A_M 17.219,20.5 r90 top
U2 "MIC2548-1YM" SOIC_8_MIC2544 33.4,12.9 r0 top
U3 "USB2422/MJ" FP-24-S4QFN-4x4B-0_5P-IPC_C 32.681,24.132 r180 top
U4 "STM32F103CBT6" STM-LQFP48_L 40.481,34.432 r270 top
U5 "XPT2046" TSSOP16 66,40.25 r180 top
U6 "LCD_TFT_2.8inch" LCD_TFT_2.8inch 53.022,26.733 r0 bottom
U7 "TJA1027T_20_1J" SOIC127P600X175-8N 81.104,39.329 r0 top
U8 "MCP2562FDT-E/SN" FP-C04-057-SN-MFG 85.043,15.194 r270 top
U9 "STM32G474QET6" QFP40P1600X1600X160-128N 72.336,26.223 r0 top
Y1 "CFPX-104 24MHz" ABM3B24MHZB2T 35.2,17.4 r90 top
Y2 "CFPX-104 8MHZ" ABM3B8MHZB2T 41.2,44.2 r180 top

## Footprints (in the part's own frame and the unit in brackets; to place one, negate y for a bottom-side part, rotate by r counter-clockwise, add the part's x,y. Pads: shape width x height; smd on the part's side, far side on the other; paste and mask are expansions set on the pad)
1X08 [mil]
  oct 56x56 hole 33.46: 1(-350,0) 2(-250,0) 3(-150,0) 4(-50,0) 5(50,0) 6(150,0) 7(250,0) 8(350,0)
  silkscreen extent -400,-50 400,50, body extent -410,-48 410,50, height 197
1X10 [mil]
  oct 56x56 hole 33.46: 1(-450,0) 2(-350,0) 3(-250,0) 4(-150,0) 5(-50,0) 6(50,0) 7(150,0) 8(250,0) 9(350,0) 10(450,0)
  silkscreen extent -500,-50 500,50, body extent -510,-50 510,48, height 197
2X18 [mil]
  oct 66x66 hole 37.4: 1(-850,-50) 2(-850,50) 3(-750,-50) 4(-750,50) 5(-650,-50) 6(-650,50) 7(-550,-50) 8(-550,50) 9(-450,-50) 10(-450,50) 11(-350,-50) 12(-350,50) 13(-250,-50) 14(-250,50) 15(-150,-50) 16(-150,50) 17(-50,-50) 18(-50,50) 19(50,-50) 20(50,50) 21(150,-50) 22(150,50) 23(250,-50) 24(250,50) 25(350,-50) 26(350,50) 27(450,-50) 28(450,50) 29(550,-50) 30(550,50) 31(650,-50) 32(650,50) 33(750,-50) 34(750,50) 35(850,-50) 36(850,50)
  silkscreen extent -900,-100 900,100, body extent -910,-100 910,99, height 197
632723300011 [mm]
  rect 0.3x1.2 smd: A1(-2.75,5.93) A2(-2.25,5.93) A3(-1.75,5.93) A4(-1.25,5.93) A5(-0.75,5.93) A6(-0.25,5.93) A7(0.25,5.93) A8(0.75,5.93) A9(1.25,5.93) A10(1.75,5.93) A11(2.25,5.93) A12(2.75,5.93)
  round 0.65 hole 0.4 paste+0: B1(2.8,4.68) B2(2.4,3.98) B3(1.6,3.98) B4(1.2,4.68) B5(0.8,3.98) B6(0.4,4.68) B7(-0.4,4.68) B8(-0.8,3.98) B9(-1.2,4.68) B10(-1.6,3.98) B11(-2.4,3.98) B12(-2.8,4.68) G1(2,4.68) G2(-2,4.68)
  oval 1x1.6 hole 0.6 slot 1.2 at 90 deg: Shell(-4.27,-1.2) Shell(-4.27,3.53) Shell(4.27,-1.2) Shell(4.27,3.53)
  rect 0.2x1 smd: Shell(0,-1.75) Shell(0,1.35)
  silkscreen extent -4.37,-4.45 4.34,5, body extent -4.37,-5.6 4.37,6.19, height 3.05
ABM3B8MHZB2T [mm]
  rect 1.8x1.2 smd: 1(-2,-1.2) 2(2,-1.2) 3(2,1.2) 4(-2,1.2)
  silkscreen extent -3.4,-1.6 0.6,1.6, body extent -2.52,-1.65 2.56,1.65, height 1.1
ABM3B24MHZB2T [mm]
  rect 1.2x1.8 smd: 1(-1.2,2) 2(-1.2,-2) 3(1.2,-2) 4(1.2,2)
  silkscreen extent -1.79,-0.7 1.6,3.6, body extent -1.7,-2.54 1.6,2.54, height 1.1
BLM2102FB0805 [mm]
  rect 1.1x1.2 smd paste-0.05 mask+0.05: 1(-0.95,0) 2(0.95,0)
  silkscreen extent -2.4,-1.5 2.4,1.5, body extent -2.15,-1.28 2.15,1.28, height 0.25
C0603 [mm]
  rect 0.9x0.8 smd paste-0.05 mask+0.05: 1(-0.75,0) 2(0.75,0)
  silkscreen extent -1.4,-0.7 1.4,0.65, body extent -0.75,-0.4 0.85,0.4, height 0.55
C1206 [mm]
  rect 1.5x1.2 smd paste-0.05 mask+0.05: 1(-1.65,0) 2(1.65,0)
  silkscreen extent -2.65,-1.2 2.7,1.15, body extent -1.55,-0.8 1.65,0.8, height 0.85
DCY0004A_M [mm]
  rrect10% 2.05x1 smd: 1(-3.175,2.3) 2(-3.175,0) 3(-3.175,-2.3)
  rrect5% 2.05x3.25 smd: 4(3.175,0)
  silkscreen extent -3.92,-3.35 1.85,3.62, body extent -3.5,-3.25 3.5,3.25, height 1.62
ESHF-110-01-L-D-SM-LC [mm]
  rect 0.74x2.795 smd: 1(-5.715,-2.033) 2(-5.715,2.033) 3(-4.445,-2.033) 4(-4.445,2.033) 5(-3.175,-2.033) 6(-3.175,2.033) 7(-1.905,-2.033) 8(-1.905,2.033) 9(-0.635,-2.033) 10(-0.635,2.033) 11(0.635,-2.033) 12(0.635,2.033) 13(1.905,-2.033) 14(1.905,2.033) 15(3.175,-2.033) 16(3.175,2.033) 17(4.445,-2.033) 18(4.445,2.033) 19(5.715,-2.033) 20(5.715,2.033)
  round 1.19 hole 1.19 unplated: ""(-10.945,0) ""(10.945,0)
  silkscreen extent -11.43,-4.04 11.43,3.05, body extent -11.36,-3.05 11.5,3.05, height 5.46
Fiducial [mm]
  round 1 smd paste-2 mask+0.5: F(0,0)
  Top (LS) keep-out region: 0,-1 -0.383,-0.924 -0.707,-0.707 -0.924,-0.383 -1,0 -1,0 -0.924,0.383 -0.707,0.707 -0.383,0.924 0,1 0,1 0.383,0.924 0.707,0.707 0.924,0.383 1,0 1,0 0.924,-0.383 0.707,-0.707 0.383,-0.924 0,-1
FP-24-S4QFN-4x4B-0_5P-IPC_C [mm]
  rect 0.761x0.239 smd paste+0 mask+0: 1(-1.876,1.25)
  rrect100% 0.761x0.239 smd paste+0 mask+0: 2(-1.876,0.75) 3(-1.876,0.25) 4(-1.876,-0.25) 5(-1.876,-0.75) 6(-1.876,-1.25) 13(1.876,-1.25) 14(1.876,-0.75) 15(1.876,-0.25) 16(1.876,0.25) 17(1.876,0.75) 18(1.876,1.25)
  rrect100% 0.239x0.761 smd paste+0 mask+0: 7(-1.25,-1.876) 8(-0.75,-1.876) 9(-0.25,-1.876) 10(0.25,-1.876) 11(0.75,-1.876) 12(1.25,-1.876) 19(1.25,1.876) 20(0.75,1.876) 21(0.25,1.876) 22(-0.25,1.876) 23(-0.75,1.876) 24(-1.25,1.876)
  rect 2.6x2.6 smd paste-1000 mask+0: 25(0,0)
  silkscreen extent -2.93,-2 2,2, body extent -2.36,-2.36 2.36,2.36, height 0.25
FP-C04-057-SN-MFG [mm]
  rect 1.55x0.6 smd: 1(-2.7,1.905) 2(-2.7,0.635) 3(-2.7,-0.635) 4(-2.7,-1.905) 5(2.7,-1.905) 6(2.7,-0.635) 7(2.7,0.635) 8(2.7,1.905)
  silkscreen extent -2.93,-2.5 1.55,3.08, body extent -3.57,-2.75 3.57,2.75, height 0.25
FP-SP3051-IPC_C [mm]
  rect 1.205x0.536 smd paste+0 mask+0: 1(-1.05,0.95)
  rrect100% 1.205x0.536 smd paste+0 mask+0: 2(-1.05,0) 3(-1.05,-0.95) 4(1.05,-0.95) 5(1.05,0) 6(1.05,0.95)
  silkscreen extent -2.43,-1.45 0.05,1.45, body extent -1.4,-1.45 1.4,1.45, height 1.45
"FPC 1734839-5" [mm] "5-pin 0.5mm FPC zif top connector AMP TE"
  rect 3.1x2.3 smd: 0(1.75,1.75) 0(1.75,-3.75)
  rect 1.1x0.3 smd: 1(0,-2) 2(0,-1.5) 3(0,-1) 4(0,-0.5) 5(0,0)
  silkscreen extent -1.1,-5 5,3, body extent -0.25,-4.97 4.86,2.97, height 2.05
H1x6 [mm]
  round 1.75 hole 1: 1(6.35,0) 2(3.81,0) 3(1.27,0) 4(-1.27,0) 5(-3.81,0) 6(-6.35,0)
  silkscreen extent -7.62,-1.27 7.62,1.27, body extent -7.62,-1.27 7.62,1.27, height 8.4
H1x6_no3D [mm]
  round 1.5 hole 1: 1(6.325,0.176) 2(3.785,-0.176) 3(1.245,0.176) 4(-1.295,-0.176) 5(-3.835,0.176) 6(-6.375,-0.176)
LCD_TFT_2.8inch [mm]
  rect 3.4x0.4 smd: 1(-4,12.71) 2(-4,11.91) 3(-4,11.11) 4(-4,10.31) 5(-4,9.51) 6(-4,8.71) 7(-4,7.91) 8(-4,7.11) 9(-4,6.31) 10(-4,5.51) 11(-4,4.71) 12(-4,3.91) 13(-4,3.11) 14(-4,2.31) 15(-4,1.51) 16(-4,0.71) 17(-4,-0.09) 18(-4,-0.89) 19(-4,-1.69) 20(-4,-2.49) 21(-4,-3.29) 22(-4,-4.09) 23(-4,-4.89) 24(-4,-5.69) 25(-4,-6.49) 26(-4,-7.29) 27(-4,-8.09) 28(-4,-8.89) 29(-4,-9.69) 30(-4,-10.49) 31(-4,-11.29) 32(-4,-12.09) 33(-4,-12.89) 34(-4,-13.69) 35(-4,-14.49) 36(-4,-15.29) 37(-4,-16.09)
  body extent -24.29,-24.86 45.18,25.26, height 2.72
LED0603 [mm]
  rrect10% 0.9x1.05 smd: 1(-0.7,0) 2(0.7,0)
  silkscreen extent -0.07,-0.3 0.08,0.3, body extent -0.8,-0.4 0.8,0.4, height 0.7
LED1206 [mm]
  rect 1.5x1.5 smd: 1(-1.75,0) 2(1.75,0)
  silkscreen extent -0.65,-0.8 0.65,0.8, body extent -1.6,-0.8 1.6,0.8, height 1.1
ONSC-SOD-323-2-477-02_V [mm]
  rect 0.63x0.83 smd: 1(-1.115,0) 2(1.115,0)
  silkscreen extent -0.4,-0.67 0.4,0.67, body extent -0.85,-0.63 0.85,0.63, height 1.06
PESD1LIN_footprint [mm]
  rect 0.95x0.45 smd: 1(-1.075,0) 2(1.075,0)
  silkscreen extent -1.52,-0.7 0.9,0.72, body extent -1.37,-0.73 1.33,0.72, height 1.17
QFP40P1600X1600X160-128N [mm]
  rect 1.475x0.2 smd paste+0: 1(-7.738,6.2) 2(-7.738,5.8) 3(-7.738,5.4) 4(-7.738,5) 5(-7.738,4.6) 6(-7.738,4.2) 7(-7.738,3.8) 8(-7.738,3.4) 9(-7.738,3) 10(-7.738,2.6) 11(-7.738,2.2) 12(-7.738,1.8) 13(-7.738,1.4) 14(-7.738,1) 15(-7.738,0.6) 16(-7.738,0.2) 17(-7.738,-0.2) 18(-7.738,-0.6) 19(-7.738,-1) 20(-7.738,-1.4) 21(-7.738,-1.8) 22(-7.738,-2.2) 23(-7.738,-2.6) 24(-7.738,-3) 25(-7.738,-3.4) 26(-7.738,-3.8) 27(-7.738,-4.2) 28(-7.738,-4.6) 29(-7.738,-5) 30(-7.738,-5.4) 31(-7.738,-5.8) 32(-7.738,-6.2) 65(7.738,-6.2) 66(7.738,-5.8) 67(7.738,-5.4) 68(7.738,-5) 69(7.738,-4.6) 70(7.738,-4.2) 71(7.738,-3.8) 72(7.738,-3.4) 73(7.738,-3) 74(7.738,-2.6) 75(7.738,-2.2) 76(7.738,-1.8) 77(7.738,-1.4) 78(7.738,-1) 79(7.738,-0.6) 80(7.738,-0.2) 81(7.738,0.2) 82(7.738,0.6) 83(7.738,1) 84(7.738,1.4) 85(7.738,1.8) 86(7.738,2.2) 87(7.738,2.6) 88(7.738,3) 89(7.738,3.4) 90(7.738,3.8) 91(7.738,4.2) 92(7.738,4.6) 93(7.738,5) 94(7.738,5.4) 95(7.738,5.8) 96(7.738,6.2)
  rect 0.2x1.475 smd paste+0: 33(-6.2,-7.738) 34(-5.8,-7.738) 35(-5.4,-7.738) 36(-5,-7.738) 37(-4.6,-7.738) 38(-4.2,-7.738) 39(-3.8,-7.738) 40(-3.4,-7.738) 41(-3,-7.738) 42(-2.6,-7.738) 43(-2.2,-7.738) 44(-1.8,-7.738) 45(-1.4,-7.738) 46(-1,-7.738) 47(-0.6,-7.738) 48(-0.2,-7.738) 49(0.2,-7.738) 50(0.6,-7.738) 51(1,-7.738) 52(1.4,-7.738) 53(1.8,-7.738) 54(2.2,-7.738) 55(2.6,-7.738) 56(3,-7.738) 57(3.4,-7.738) 58(3.8,-7.738) 59(4.2,-7.738) 60(4.6,-7.738) 61(5,-7.738) 62(5.4,-7.738) 63(5.8,-7.738) 64(6.2,-7.738) 97(6.2,7.738) 98(5.8,7.738) 99(5.4,7.738) 100(5,7.738) 101(4.6,7.738) 102(4.2,7.738) 103(3.8,7.738) 104(3.4,7.738) 105(3,7.738) 106(2.6,7.738) 107(2.2,7.738) 108(1.8,7.738) 109(1.4,7.738) 110(1,7.738) 111(0.6,7.738) 112(0.2,7.738) 113(-0.2,7.738) 114(-0.6,7.738) 115(-1,7.738) 116(-1.4,7.738) 117(-1.8,7.738) 118(-2.2,7.738) 119(-2.6,7.738) 120(-3,7.738) 121(-3.4,7.738) 122(-3.8,7.738) 123(-4.2,7.738) 124(-4.6,7.738) 125(-5,7.738) 126(-5.4,7.738) 127(-5.8,7.738) 128(-6.2,7.738)
  silkscreen extent -8.37,-6.65 6.65,6.9, body extent -8,-8 8,8, height 1.6
R1608_0603I_L [mm]
  rect 0.9x0.8 smd paste-0.05 mask+0.05: 1(-0.75,0) 2(0.75,0)
  silkscreen extent -1.45,-0.7 1.45,0.7, body extent -0.8,-0.4 0.8,0.4, height 0.46
SOD1608X70N [mm]
  rect 0.825x0.5 smd: 1(-0.788,0) 2(0.788,0)
  silkscreen extent -1.2,-0.4 0.6,0.4, body extent -0.87,-0.45 0.83,0.45, height 0.7
SOIC127P600X175-8N [mm]
  rect 1.55x0.7 smd: 1(-2.725,1.905) 2(-2.725,0.635) 3(-2.725,-0.635) 4(-2.725,-1.905) 5(2.725,-1.905) 6(2.725,-0.635) 7(2.725,0.635) 8(2.725,1.905)
  silkscreen extent -3.5,-2.45 1.6,2.61, body extent -3,-2.45 3,2.45, height 1.75
SOIC_8_MIC2544 [mm]
  rrect25% 1.97x0.6 smd: 1(-2.595,1.805) 2(-2.595,0.535) 3(-2.595,-0.735) 4(-2.595,-2.005) 5(2.355,-2.005) 6(2.355,-0.735) 7(2.355,0.535) 8(2.355,1.805)
  silkscreen extent -2.07,-2.55 1.8,2.35, body extent -3.12,-2.6 2.88,2.4, height 1.75
SOLDER_JUMPER [mm]
  rrect10% 0.8x1.2 smd: 1(0.46,0) 2(-0.46,0)
SOT23-3_L [mm]
  rrect51% 0.63x0.86 smd: 1(-0.96,-1.045) 2(0.96,-1.045) 3(0,1.045)
  silkscreen extent -1.52,-0.7 1.52,0.7, body extent -1.46,-1.18 1.46,1.18, height 1.12
SOT23127P600-8N [mm]
  rect 0.9x0.55 smd: 1(-1.125,0.65) 2(-1.125,-0.65) 3(1.125,0)
  silkscreen extent -2.19,-1.1 0.67,1.1, body extent -1.17,-1.1 1.22,1.1, height 1.1
STM-LQFP48_L [mm]
  oval 1.55x0.25 smd: 1(-4.025,2.75) 2(-4.025,2.25) 3(-4.025,1.75) 4(-4.025,1.25) 5(-4.025,0.75) 6(-4.025,0.25) 7(-4.025,-0.25) 8(-4.025,-0.75) 9(-4.025,-1.25) 10(-4.025,-1.75) 11(-4.025,-2.25) 12(-4.025,-2.75) 25(4.025,-2.75) 26(4.025,-2.25) 27(4.025,-1.75) 28(4.025,-1.25) 29(4.025,-0.75) 30(4.025,-0.25) 31(4.025,0.25) 32(4.025,0.75) 33(4.025,1.25) 34(4.025,1.75) 35(4.025,2.25) 36(4.025,2.75)
  oval 0.25x1.55 smd: 13(-2.75,-4.025) 14(-2.25,-4.025) 15(-1.75,-4.025) 16(-1.25,-4.025) 17(-0.75,-4.025) 18(-0.25,-4.025) 19(0.25,-4.025) 20(0.75,-4.025) 21(1.25,-4.025) 22(1.75,-4.025) 23(2.25,-4.025) 24(2.75,-4.025) 37(2.75,4.025) 38(2.25,4.025) 39(1.75,4.025) 40(1.25,4.025) 41(0.75,4.025) 42(0.25,4.025) 43(-0.25,4.025) 44(-0.75,4.025) 45(-1.25,4.025) 46(-1.75,4.025) 47(-2.25,4.025) 48(-2.75,4.025)
  silkscreen extent -4.15,-2.85 2.85,3.55, body extent -4.5,-4.5 4.5,4.5, height 1.5
"Tipka 6x6"#1 [mm]
  rrect10% 1.3x2 smd paste-0.65: 1(-2.25,-3.95) 2(-2.25,4) 3(2.25,-3.95) 4(2.25,4)
  silkscreen extent -2.95,-3.2 2.95,3.3, body extent -3.1,-3.97 2.9,4.17, height 5
"Tipka 6x6"#2 [mm]
  rrect10% 1.3x2 smd: 1(-2.25,-3.95) 2(-2.25,4) 3(2.25,-3.95) 4(2.25,4)
  silkscreen extent -2.95,-3.2 2.95,3.3, body extent -3.1,-3.97 2.9,4.18, height 5
TSSOP16 [mil]
  rect 12x39 smd: 1(-89.57,-114.87) 2(-63.98,-114.87) 3(-38.39,-114.87) 4(-12.8,-114.87) 5(12.8,-114.87) 6(38.39,-114.87) 7(63.98,-114.87) 8(89.57,-114.87) 9(89.57,114.87) 10(63.98,114.87) 11(38.39,114.87) 12(12.8,114.87) 13(-12.8,114.87) 14(-38.39,114.87) 15(-63.98,114.87) 16(-89.57,114.87)
  silkscreen extent -106,-134 106,83, body extent -98,-126 99,126, height 47
W25Q128JVSIM [mm]
  rrect25% 1.65x0.58 smd: 1(-3.585,1.905) 2(-3.585,0.635) 3(-3.585,-0.635) 4(-3.585,-1.905) 5(3.585,-1.905) 6(3.585,-0.635) 7(3.585,0.635) 8(3.585,1.905)
  silkscreen extent -5.33,-2.62 2.65,2.62, body extent -4.13,-2.67 4.13,2.66, height 2.03

## Part data
A1 BTN_DOWN1 BTN_ESC1 BTN_LEFT1 BTN_OK1 BTN_RIGHT1 BTN_UP1: "Tactile switch SMD", Code=Q-PBUTTON
C1 C2 C3 C4 C5 C6 C7 C8 C9 C10 C11 C12 C13 C14 C15 C16 C17 C18 C19 C20 C21 C22 C23 C24 C25 C27 C28 C29 C30 C31 C32 C33 C34 C35 C36 C37 C38 C39 C40 C41 C42 C43 C44 C45 C46 C47 C48 C49 C50 C51 C52 C53 C54 C55 C56 C57 C58 C59 C60: library part C, "Capacitor"
  C1 C2 C4 C5 C6 C7 C29 C30 C36: Code=NB7-4U7-25V
  C3: Code=NH4-1N2KV
  C8 C11 C17 C18 C19 C20 C21 C23 C27 C28 C35 C38 C39 C40 C41 C42 C43 C44 C45 C46 C47 C48 C49 C50 C51 C52 C53 C54 C55 C56 C57 C58 C59 C60: Code=NB6-100N
  C9 C10 C14 C15 C16: Code=NB7-1U-25V
  C12 C13 C22 C24 C25 C31 C32 C33 C34: Code=NB2-10P
  C37: Code=NB4-1N
D1: "TVS DIODE 6V 17V SOT23-6", Breakdown voltage=8V, Capacitance=1.7pF, Clamping voltage=14.3V, Manufacturer=Littelfuse, Package=SP3051, Peak Pulse Current=20A, Peak Pulse Power=400W, Reverse Standoff Voltage=6V, Temperature="-40°C to +125°C", Temperature Range High=+125°C, Temperature Range Low=-40°C, Automotive=No, Category=Diode, Code=KDSP3051, ComponentLink2Description=Datasheet, ComponentLink2URL=https://www.littelfuse.com/~/media/electronics/datasheets/tvs_diode_arrays/littelfuse_tvs_diode_array_sp3051_datasheet.pdf.pdf, Device Class L1="Circuit Protection", Device Class L2="TVS Diodes", Device Class L3=unset, Digikey Description="TVS DIODE 6V 17V SOT23-6", Direction=Unidirectional, Height=1.45mm, Ipc Land Pattern Name=SOT95P280X118-6, Lead Free=Yes, Manufacturer Part Number=SP3051-04HTG, Mouser Description="TVS Diodes / ESD Suppressors 6V 20A for Lightning Surge PRO SOT23-6", Number Of Channels=4, Octopart=https://octopart.com/sp3051-04htg-littelfuse-29505621, ROHS=TRUE, Standoff Height=0mm
D2 D3 D4 D5: "Schottky Barrier Diode, 2-Pin SOD-323, Pb-Free, Tape and Reel", Manufacturer="ON Semiconductor / Fairchild", Code=KDBAT54H, ComponentLink1Description="Manufacturer URL", ComponentLink1URL=http://www.onsemi.com/, ComponentLink2Description=Datasheet, ComponentLink2URL=http://www.onsemi.cn/pub_link/Collateral/BAT54HT1-D.PDF, ComponentLink3Description="Package Specification", ComponentLink3URL=http://www.onsemi.com/pub_link/Collateral/477-02.PDF.1, Configuration=Single, DatasheetVersion="Rev. 6", IFSM Max (A)=0.6, Manufacturer Part Number=BAT54HT1G, Mounting Technology="Surface Mount", PackageDescription="2-Pin SOD, Body 1.7 x 1.25 mm", PackageReference=SOD-323-2-477-02, PackageVersion="Rev. H, 03/2007", Packing="Tape and Reel", PartNumber=BAT54HT1G, ROHS=TRUE, trr Max (ns)=5
D6: "LIN-bus ESD protection diode", Code=KD-PESD1LIN
D7: "SOT23127P600-8N / Dual Line Automotive Bus protection /  / Datasheet: https://www.onsemi.com/pdf/datasheet/nup2125-d.pdf", Code=KD-NUP2125
D8 D9 D10 D11 D12 D13 D14 D15 D16 D17: "TVS Diode (Uni-directional)", Manufacturer_Name="ON Semiconductor", Mouser Part Number=863-ESD7371XV2T1G, Arrow Part Number=ESD7371XV2T1G, Arrow Price/Stock=https://www.arrow.com/en/products/esd7371xv2t1g/on-semiconductor, Code=KD-ESD7371X, Datasheet Link=http://www.onsemi.com/pub/Collateral/ESD7371-D.PDF, Height=0.7mm, Manufacturer_Part_Number=ESD7371XV2T1G, Mouser Price/Stock=https://www.mouser.co.uk/ProductDetail/ON-Semiconductor/ESD7371XV2T1G?qs=dbuNSGnowt2%2F4vd%2Frk8Hiw%3D%3D
FB1 FB2: "Chip Ferrite Bead, 0805, 200Ω @ 100MHz, 0.26Ω, 25%, 500mA", Case Code (Imperial)=0805, Case Code (Metric)=2012, Current Rating=500mA, DC Resistance (DCR)=260mR, DC Resistance-Max=350mR, Max DC Current=200mA, Max Operating Temperature=125°C, Min Operating Temperature=-55°C, Package Quantity=4000, Test Frequency=100MHz, Tolerance=25%, Case/Package=0805, Code=LZ-FB0805, Core Material=Ferrite, Depth=1.25mm, Height=0.85mm, Impedance=200R, Lead Free="Lead Free", Length=2mm, Material=Steel, Max Current Rating=500mA, Number of Circuits=1, Number of Lines=1, Number of Pins=2, Packaging="Tape and Reel", REACH SVHC="No SVHC", Series=BLM21B, Shielding=Unshielded, Termination=SMD/SMT, Width=1.25mm
FID1 FID2 FID3: "according to IPC-7351 - is a 1mm diameter round dot with 2mm solder mask opening", max.Temperature=+125, min.Temperature=-40, Tolerance=5%, Voltage=50V
IC1: "FLASH - NOR Memory IC 128Mb (16M x 8) SPI - Quad I/O, QPI, DTR 133MHz 8-SOIC"
J1: "USB 3.1 Type C Receptacle WR-COM, Horizontal, SMT / THT", Contact Resistance=30mOhm, Manufacturer="Wurth Electronics", Operating Temperature=-40to105degC, Rated Current=5A, Working Voltage=20VDC, Code=QBUSB-TYPEC-TM, Connector Type=USB3.1TypeC, Datasheet URL=https://katalog.we-online.de/em/datasheet/632723x00011%282%29.pdf, Gender=Receptacle, Manufacturer Part Number=632723300011, Manufacturer URL=http://www.we-online.de, Mounting Technology=SMT/THT, Orientation=Horizontal, Package Reference=632723300011, Packaging=TapeandReel, Part Number=632723300011, Publisher=WurthElektronik
J2 J3: library part H1x6
J4 J6 J8 J9 J10: library part PINHD-1X8, "PINHD-1X8"
J5: library part PINHD-2X18, "PINHD-2X18"
J7: library part PINHD-1X10, "PINHD-1X10"
J11: library part "FPC 1734839-5", "TE connectivity  FPC 5 pin 0.5 mm ZIF top contact female connector 1734839-5", Supplier Part Number 1=3398656, Supplier 1=Farnell
J12: "Trace/JTAG/SW connector", Code=QYS50-20-M-SMD-LC
LED1 LED3 LED4: library part LED, "Green light-emitting diode", Code=KLC-G
LED2 LED5: library part LED, "Red light-emitting diode", Code=KLC-R
LED6 LED7 LED8 LED9 LED10 LED11 LED12 LED13: library part LED, "LED", Code=KLB-B
M1 M2: library part BSH103, "BSH103-T/R (NMOS)", Code=BSH103-T/R
Q1: "Bipolar (BJT) Transistor NPN 45V 100mA 100MHz 250mW Surface Mount TO-236AB", Package="SOT-23 Nexperia USA", Arrow_Electronics-Purchase-URL=https://snapeda.com/shop?store=Arrow+Electronics&id=590780, Availability=Unavailable, Code=KT-NPN-S, MF="Nexperia USA", MP=BC847C, Price=None, SnapEDA_Link=https://www.snapeda.com/parts/BC847C/Nexperia%20USA%20Inc./view-part/590780/?ref=snap
R1 R2 R3 R4 R5 R6 R7 R8 R9 R10 R11 R12 R13 R14 R15 R16 R17 R18 R19 R20 R21 R22 R23 R24 R25 R26 R27 R28 R29 R30 R31 R32 R33 R34 R35 R36 R37 R38 R39 R40 R41 R42 R43 R44 R45 R46 R47 R48 R49 R50 R51 R52 R53 R54 R55 R56 R57 R58 R59 R60 R61 R62 R63 R64 R65 R66 R67 R68 R69 R70 R71 R72 R73 R74 R75 R76 R77 R78 R79 R80 R81 R82 R83 R84 R85 R86 R87 R88 R89 R90 R91 R92 R93 R94 R95: library part R, "R"
  R1 R2 R3 R4 R14 R15 R16 R18 R21 R26 R27 R29 R32 R41 R43 R44 R52 R57 R58 R59 R62 R63 R94 R95: Code=LC5-10K
  R5: Code=LC7-1M
  R6 R7 R8 R9 R10 R11 R20 R22 R23 R24 R36 R37 R38 R47 R49 R50 R51 R60 R67 R68 R69 R70 R71 R72 R73 R74 R75 R76 R77 R78 R79 R80 R81 R82 R83 R84 R85 R86 R87 R88 R90 R91 R92 R93: Code=LC4-1K
  R12 R13 R25 R28 R30 R31 R33 R34 R39 R40 R42 R53 R54 R55 R56 R64 R65 R89: Code=LC2-56E
  R17 R19 R35 R45 R46 R48: Code=LC6-100K
U1: "800mA Low-Dropout Linear Regulator, 4-pin SOT-223, Pb-Free /  / DataSheet:  / https://www.ti.com/lit/ds/symlink/lm1117.pdf?ts=1629838143263&ref_url=https%253A%252F%252Fwww.google.com%252F", Manufacturer="Texas Instruments", PackageTopMarking=XYTT*N05A, PartNumber=LM1117MPX-3.3/NOPB, PowerWise=N, Code=FRL-33-LM1117, Code_IPC=SOT223-4, Code_JEDEC=TO-261-AA, ComponentLink1Description="Datasheet URL", ComponentLink1URL=http://www.ti.com/general/docs/lit/getliterature.tsp?genericPartNumber=LM1117-N&fileType=pdf, CompType="LDO IC", High-Reliability=Y, PackageDescription="Molded SOT-223, 6.50 x 3.56 x 1.6mm Body, 4 Lead, 2.3mm Pitch", PackageReference=DCY0004A, PinCount=4, ROHS=Y
U2: library part MIC2544-1YM, "IC PWR SWITCH N-CHAN 1:1 8MSOP /  / DataSheet: / https://ww1.microchip.com/downloads/en/DeviceDoc/20005725B.pdf", Case/Package=MSOP, Current Rating=1.5A, Manufacturer=Microchip, Manufacturer Part Number=MIC2544-1YMM-TR, Max Operating Temperature=85°C, Max Supply Voltage=5.5V, Min Operating Temperature=-40°C, Min Supply Voltage=2.7V, Nominal Supply Current=5uA, On-State Resistance=120mR, On-state Resistance-Max=120MR, Package Quantity=2500, Code=FS-MIC2544, Fault Protection="Over Temperature", Interface=On/Off, Max output current=1.5A, Mount="Surface Mount", Number of Outputs=1, Number of Pins=8, Number of Switches=1, Output Configuration="High Side", Packaging="Tape and Reel", Radiation Hardening=No, Rated Current-Max=1.5A, Series=-, Supply Current=5uA, Turn-Off Delay Time=22us, Turn-On Delay Time=5ms
U3: "IC HUB CTLR USB 2.0 24QFN /  / DataSheet: / http://ww1.microchip.com/downloads/en/devicedoc/00001726b.pdf", Case/Package=QFN, Max Operating Temperature=70°C, Min Operating Temperature=0°C, Operating Supply Current=70mA, Operating Supply Voltage=3.3V, Package Quantity=490, Code=FC-USB2422MJ, Data Rate=480Mbps, Interface=I2C, Lead Free="Lead Free", Number of Pins=24, Number of Ports=2, Packaging=Bulk, RoHS Compliant=Yes
U4: "ARM Cortex-M3 32-bit MCU, 128 KB Flash, 20 KB Internal RAM, 37 I/Os, 48-pin LQFP, -40 to 85 degC, Tray /  / DataSheet: / https://www.st.com/resource/en/datasheet/stm32f103c8.pdf /  /  / About STLINK: / https://www.st.com/resource/en/user_manual/dm00231744-stm32-nucleo-32-boards-mb1180-stmicroelectronics.pdf", I/Os (High Current)=37, Manufacturer=STMicroelectronics, Operating Frequency(F) (Processor speed) (MHz)=72, Supply Voltage(Vcc) min (V)=2, A/D Converter="2x12-bit (10 Channel)", Code=BSTM32F103CBT6, ComponentLink1Description="Manufacturer URL", ComponentLink1URL=http://www.st.com/web/en/home.html, ComponentLink2Description=Datasheet, ComponentLink2URL=http://www.st.com/st-web-ui/static/active/en/resource/technical/document/datasheet/CD00161566.pdf, ComponentLink3Description="Package Specification", ComponentLink3URL=http://www.st.com/st-web-ui/static/active/en/resource/technical/document/datasheet/DM00058181.pdf, Core="ARM Cortex-M3", DatasheetVersion="Rev. 16", FLASH Size (Prog) (kB)=128, Internal RAM Size (kB)=20, Manufacturer Part Number=STM32F103CBT6, Mounting Technology="Surface Mount", PackageDescription="48-Pin Low Profile Quad Flat Package, 7 x 7 mm Body, 0.5 mm Pitch", PackageReference=LQFP48, PackageVersion="Rev. 6, 06/2013", Packing=Tray, PartNumber=STM32F103CBT6
U5: "LCD touch controller", Package=Package, Check_prices=https://www.snapeda.com/parts/XPT2046/Xptek/view-part/5164510/?ref=eda, Code=KLCD-XPT2046, ComponentLink1Description=Supplier1, ComponentLink2Description="Supplier 1 code", MF=Xptek, MP=XPT2046, Price=None
U7: "Integrated Circuit, LIN Transciever /  / DataSheet: / https://www.nxp.com/docs/en/data-sheet/TJA1027.pdf", Arrow Part Number=TJA1027T/20/1J, Manufacturer_Name=NXP, Mouser Part Number=771-TJA1027T/20/1J, Arrow Price/Stock=https://www.arrow.com/en/products/tja1027t201j/nxp-semiconductors, Code=FC-TJA1027, Datasheet Link=http://www.nxp.com/docs/en/data-sheet/TJA1027.pdf, Height=1.75mm, Manufacturer_Part_Number=TJA1027T/20/1J, Mouser Price/Stock=https://www.mouser.co.uk/ProductDetail/NXP-Semiconductors/TJA1027T-20-1J?qs=8qdoF%2F2f1vr94fCG5MNBhg%3D%3D
U8: "IC TRANSCEIVER 1/1 8SOIC", Case/Package=SOIC, Max Operating Temperature=125°C, Max Supply Voltage=5.5V, Min Operating Temperature=-40°C, Min Supply Voltage=4.5V, Operating Supply Current=70mA, Package Quantity=3300, Code=FC-MCP2562FD, Data Rate=8Mbps, Mount="Surface Mount", Number of Pins=8, Number of Transceivers=1, Packaging="Tape and Reel", Receiver Hysteresis=200mV, Weight=0.019048oz
U9: "Mainstream Arm Cortex - M3 MCU 170Mhz with 512 Kbytes of Flash memory, Math Accelerator, HR timer, High Analog level integration /  / DataSheet: / https://www.st.com/en/microcontrollers-microprocessors/stm32g474qe.html", Manufacturer_Name=STMicroelectronics, Mouser Part Number=511-STM32G474QET6, Arrow Part Number=STM32G474QET6, Arrow Price/Stock=https://www.arrow.com/en/products/stm32g474qet6/stmicroelectronics?region=nac, Code=BSTM32G474QET6, Datasheet Link=https://componentsearchengine.com/Datasheets/1/STM32G474QET6.pdf, Height=1.6mm, Manufacturer_Part_Number=STM32G474QET6, Mouser Price/Stock=https://www.mouser.co.uk/ProductDetail/STMicroelectronics/STM32G474QET6?qs=PzGy0jfpSMtk6tieSqAtNg%3D%3D
Y1: library part ABM3B-24MHZ-B-2-T, Supplier Part Number 1=830032817, ComponentLink1Description="New link", ComponentLink1URL=https://www.we-online.com/catalog/datasheet/830032817.pdf, Supplier 1="Würth elektronik"
Y2: library part ABM3B-8MHZ-B-2-T, Manufacturer_Name="Würth elektronik", Manufacturer_Part_Number=830055901, Datasheet Link=https://www.we-online.com/catalog/datasheet/830055901.pdf, Height=1.1mm, Supplier 1="Würth elektronik", Supplier Part Number 1=830055901

## Free pads (board coordinates)
  round 3.2 hole 3.2 unplated: MH1(96.52,2.54) MH2(15.24,50.8) MH2(112.76,50.7) MH3(90.17,50.8) MH4(13.97,2.54) MH4(114.03,2.44)
  round 1.5 hole 1.5 unplated: MH4(105.6,24.68) MH4(123.82,41.04)

## Via types
v1: diameter 0.5, hole 0.2, Top (LS) to Bottom (HS), tented both sides, 500 vias